# EAGLE board FlexMedusaSubmitted (EAGLE 6.4)
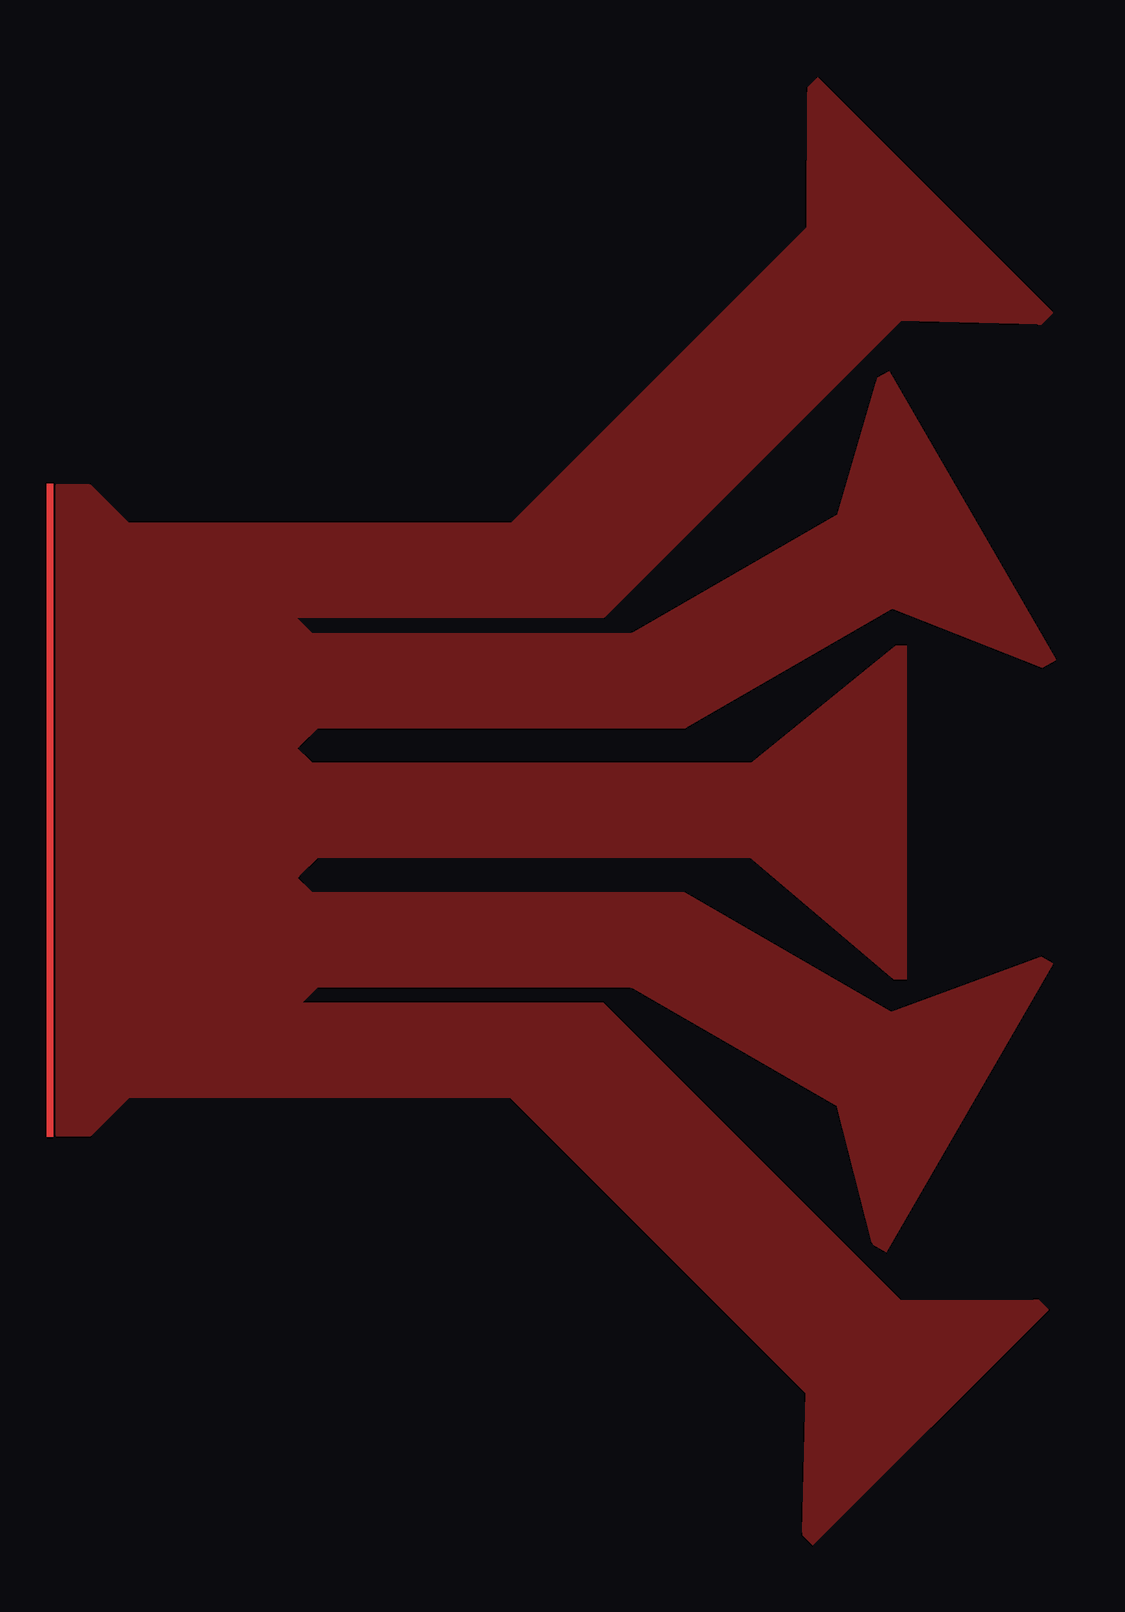
[diagram p0: board, top side]
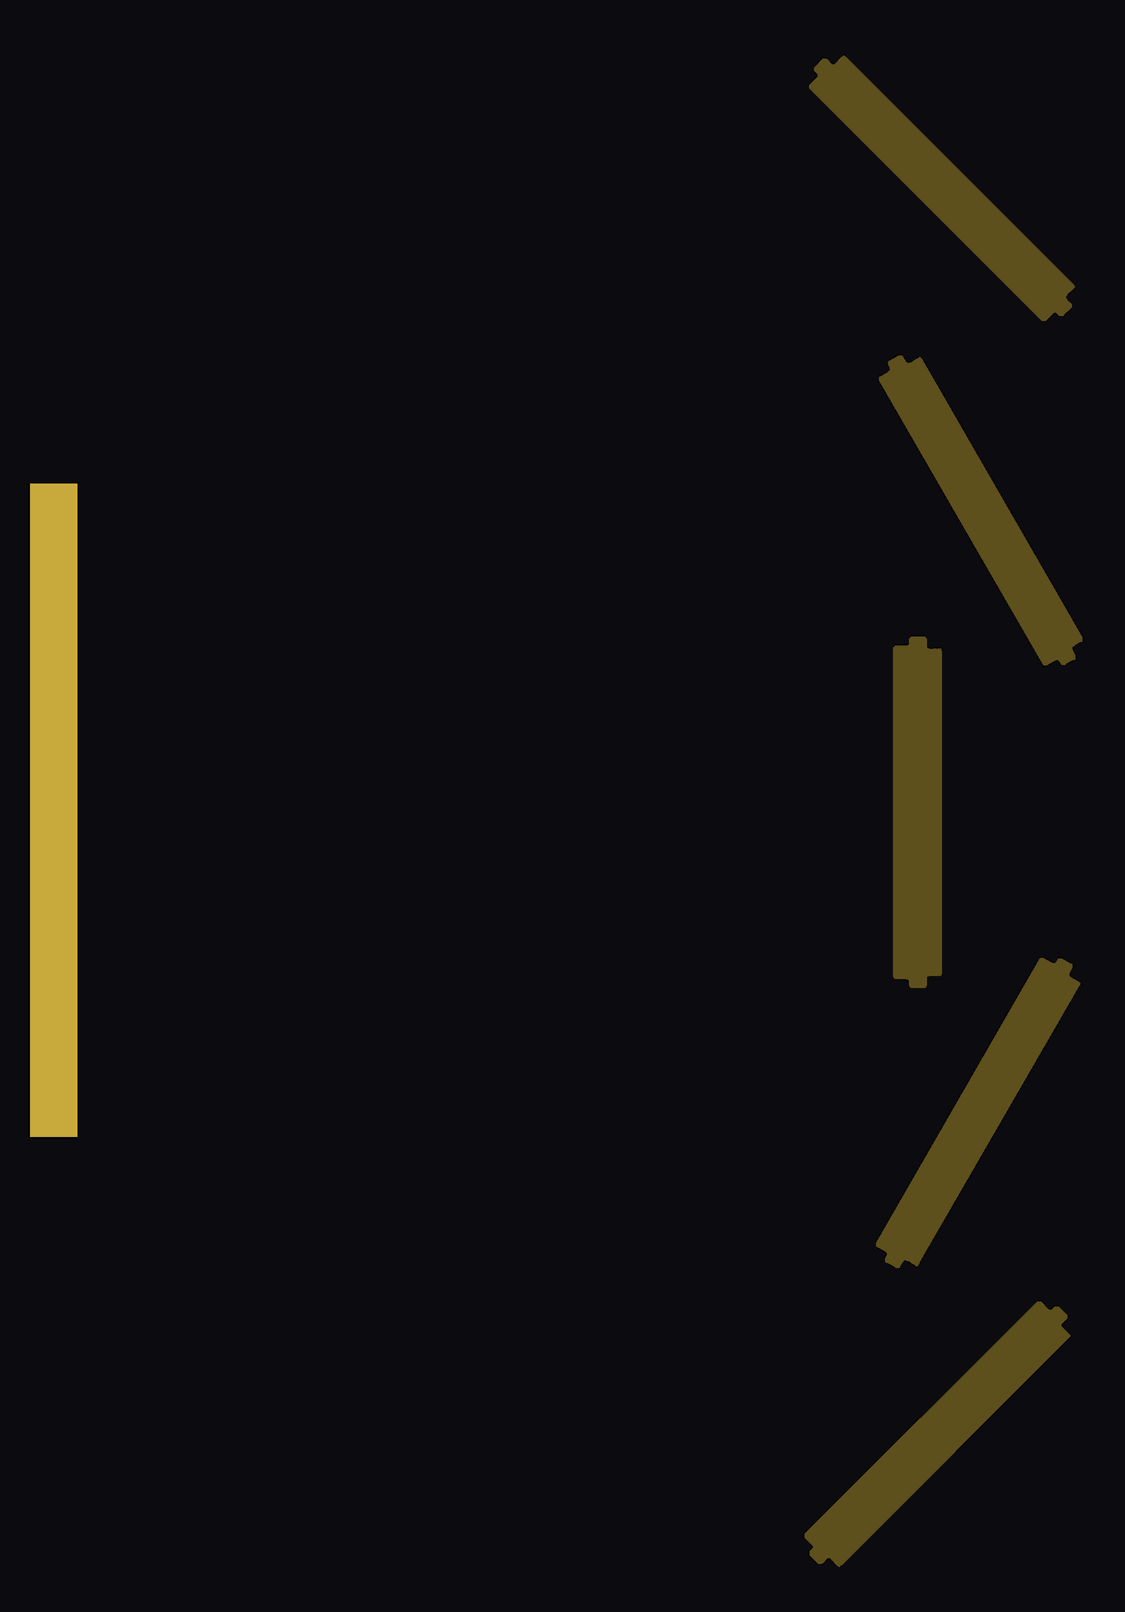
[diagram p1: board, inner layer Stiffner]
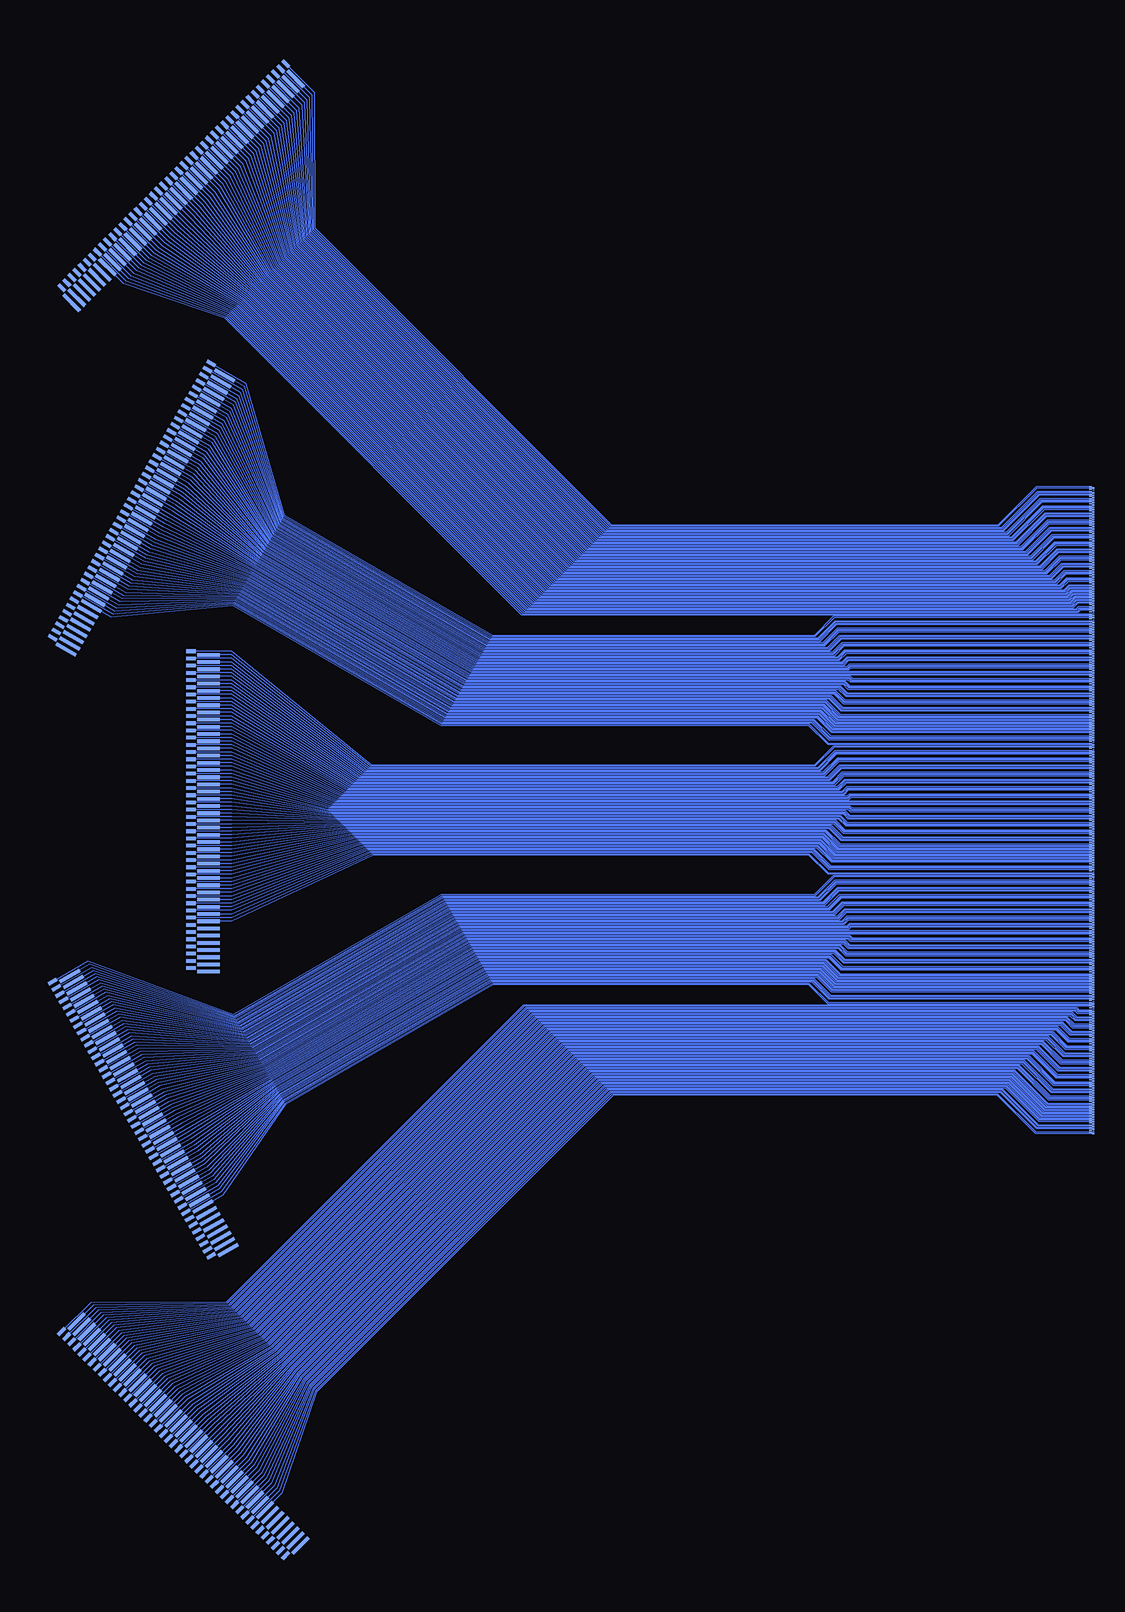
[diagram p2: board, bottom side, seen from below]

No outline drawn. Coordinates in mm, seen from the top.
Copper layers (1*2*3*4*16): TopCoverlay 0.035mm / dielectric 1.5mm / Stiffner 0.035mm / dielectric 0.15mm / tin 0.035mm / dielectric 0.2mm / Route4 0.035mm / dielectric 0.15mm / Copper 0.035mm
Design rules "default *": minimum track width 10mil, minimum drill 24mil, track to track 8mil, track to pad 8mil, pad to pad 8mil, via to via 8mil, smd to smd 8mil, copper to edge 40mil, drill to drill 8mil, minimum pad ring 10mil, minimum via ring 8mil, stop-mask expansion 4mil, vias tented up to drill 0mil, thermal gap 10mil

## Footprints (pad centres in the part's own frame; a part is rotated, then mirrored left to right if it is on the bottom)
WIREBOND-NEW = smd 0.18 x 0.12 bottom: P$1 0,0; P$5 0,0.4; P$7 0,0.6; P$9 0,0.8; P$11 0,1; P$13 0,1.2; P$15 0,1.4; P$17 0,1.6; P$19 0,1.8; P$21 0,2; P$23 0,2.2; P$25 0,2.4; P$27 0,2.6; P$29 0,2.8; P$31 0,3; P$33 0,3.2; P$35 0,3.4; P$37 0,3.6; P$39 0,3.8; P$41 0,4; P$43 0,4.2; P$45 0,4.4; P$47 0,4.6; P$49 0,4.8; P$51 0,5; P$53 0,5.2; P$55 0,5.4; P$57 0,5.6; P$59 0,5.8; P$61 0,6; P$63 0,6.2; P$65 0,6.4; P$67 0,6.6; P$69 0,6.8; P$71 0,7; P$73 0,7.2; P$75 0,7.4; P$77 0,7.6; P$79 0,7.8; P$81 0,8; P$83 0,8.2; P$85 0,8.4; P$87 0,8.6; P$89 0,8.8; P$91 0,9; P$93 0,9.2; P$95 0,9.4; P$97 0,9.6; P$99 0,9.8; P$101 0,10; P$103 0,10.2; P$107 0,10.6; P$109 0,10.8; P$113 0,11.2; P$115 0,11.4; P$117 0,11.6; P$119 0,11.8; P$121 0,12; P$123 0,12.2; P$125 0,12.4; P$127 0,12.6; P$129 0,12.8; P$131 0,13; P$133 0,13.2; P$135 0,13.4; P$137 0,13.6; P$139 0,13.8; P$141 0,14; P$143 0,14.2; P$145 0,14.4; P$147 0,14.6; P$149 0,14.8; P$151 0,15; P$153 0,15.2; P$155 0,15.4; P$157 0,15.6; P$159 0,15.8; P$161 0,16; P$163 0,16.2; P$165 0,16.4; P$167 0,16.6; P$169 0,16.8; P$171 0,17; P$173 0,17.2; P$175 0,17.4; P$177 0,17.6; P$179 0,17.8; P$181 0,18; P$183 0,18.2; P$185 0,18.4; P$187 0,18.6; P$189 0,18.8; P$191 0,19; P$193 0,19.2; P$195 0,19.4; P$197 0,19.6; P$199 0,19.8; P$201 0,20; P$203 0,20.2; P$205 0,20.4; P$207 0,20.6; P$209 0,20.8; P$211 0,21; P$215 0,21.4; P$217 0,21.6; P$221 0,22; P$223 0,22.2; P$225 0,22.4; P$227 0,22.6; P$229 0,22.8; P$231 0,23; P$233 0,23.2; P$235 0,23.4; P$237 0,23.6; P$239 0,23.8; P$241 0,24; P$243 0,24.2; P$245 0,24.4; P$247 0,24.6; P$249 0,24.8; P$251 0,25; P$253 0,25.2; P$255 0,25.4; P$257 0,25.6; P$259 0,25.8; P$261 0,26; P$263 0,26.2; P$265 0,26.4; P$267 0,26.6; P$269 0,26.8; P$271 0,27; P$273 0,27.2; P$275 0,27.4; P$277 0,27.6; P$279 0,27.8; P$281 0,28; P$283 0,28.2; P$285 0,28.4; P$287 0,28.6; P$289 0,28.8; P$291 0,29; P$293 0,29.2; P$295 0,29.4; P$297 0,29.6; P$299 0,29.8; P$301 0,30; P$303 0,30.2; P$305 0,30.4; P$307 0,30.6; P$309 0,30.8; P$311 0,31; P$313 0,31.2; P$315 0,31.4; P$317 0,31.6; P$319 0,31.8; P$323 0,32.2; P$325 0,32.4; P$329 0,32.8; P$331 0,33; P$333 0,33.2; P$335 0,33.4; P$337 0,33.6; P$339 0,33.8; P$341 0,34; P$343 0,34.2; P$345 0,34.4; P$347 0,34.6; P$349 0,34.8; P$351 0,35; P$353 0,35.2; P$355 0,35.4; P$357 0,35.6; P$359 0,35.8; P$361 0,36; P$363 0,36.2; P$365 0,36.4; P$367 0,36.6; P$369 0,36.8; P$371 0,37; P$373 0,37.2; P$375 0,37.4; P$377 0,37.6; P$379 0,37.8; P$381 0,38; P$383 0,38.2; P$385 0,38.4; P$387 0,38.6; P$389 0,38.8; P$391 0,39; P$393 0,39.2; P$395 0,39.4; P$397 0,39.6; P$399 0,39.8; P$401 0,40; P$403 0,40.2; P$405 0,40.4; P$407 0,40.6; P$409 0,40.8; P$411 0,41; P$413 0,41.2; P$415 0,41.4; P$417 0,41.6; P$419 0,41.8; P$421 0,42; P$423 0,42.2; P$425 0,42.4; P$427 0,42.6; P$431 0,43; P$433 0,43.2; P$437 0,43.6; P$439 0,43.8; P$441 0,44; P$443 0,44.2; P$445 0,44.4; P$447 0,44.6; P$449 0,44.8; P$451 0,45; P$453 0,45.2; P$455 0,45.4; P$457 0,45.6; P$459 0,45.8; P$461 0,46; P$463 0,46.2; P$465 0,46.4; P$467 0,46.6; P$469 0,46.8; P$471 0,47; P$473 0,47.2; P$475 0,47.4; P$477 0,47.6; P$479 0,47.8; P$481 0,48; P$483 0,48.2; P$485 0,48.4; P$487 0,48.6; P$489 0,48.8; P$491 0,49; P$493 0,49.2; P$495 0,49.4; P$497 0,49.6; P$499 0,49.8; P$501 0,50; P$503 0,50.2; P$505 0,50.4; P$507 0,50.6; P$509 0,50.8; P$511 0,51; P$513 0,51.2; P$515 0,51.4; P$517 0,51.6; P$519 0,51.8; P$521 0,52; P$523 0,52.2; P$525 0,52.4; P$527 0,52.6; P$529 0,52.8; P$531 0,53; P$533 0,53.2; P$535 0,53.4; P$539 0,53.8 | smd 0.18 x 0.08 bottom: P$2 0.22,0.1; P$4 0.22,0.3; P$6 0.22,0.5; P$8 0.22,0.7; P$10 0.22,0.9; P$12 0.22,1.1; P$14 0.22,1.3; P$16 0.22,1.5; P$18 0.22,1.7; P$20 0.22,1.9; P$22 0.22,2.1; P$24 0.22,2.3; P$26 0.22,2.5; P$28 0.22,2.7; P$30 0.22,2.9; P$32 0.22,3.1; P$34 0.22,3.3; P$36 0.22,3.5; P$38 0.22,3.7; P$40 0.22,3.9; P$42 0.22,4.1; P$44 0.22,4.3; P$46 0.22,4.5; P$48 0.22,4.7; P$50 0.22,4.9; P$52 0.22,5.1; P$54 0.22,5.3; P$56 0.22,5.5; P$58 0.22,5.7; P$60 0.22,5.9; P$62 0.22,6.1; P$64 0.22,6.3; P$66 0.22,6.5; P$68 0.22,6.7; P$70 0.22,6.9; P$72 0.22,7.1; P$74 0.22,7.3; P$76 0.22,7.5; P$78 0.22,7.7; P$80 0.22,7.9; P$82 0.22,8.1; P$84 0.22,8.3; P$86 0.22,8.5; P$88 0.22,8.7; P$90 0.22,8.9; P$92 0.22,9.1; P$94 0.22,9.3; P$96 0.22,9.5; P$98 0.22,9.7; P$100 0.22,9.9; P$102 0.22,10.1; P$104 0.22,10.3; P$106 0.22,10.5; P$108 0.22,10.7; P$110 0.22,10.9; P$112 0.22,11.1; P$114 0.22,11.3; P$116 0.22,11.5; P$118 0.22,11.7; P$120 0.22,11.9; P$122 0.22,12.1; P$124 0.22,12.3; P$126 0.22,12.5; P$128 0.22,12.7; P$130 0.22,12.9; P$132 0.22,13.1; P$134 0.22,13.3; P$136 0.22,13.5; P$138 0.22,13.7; P$140 0.22,13.9; P$142 0.22,14.1; P$144 0.22,14.3; P$146 0.22,14.5; P$148 0.22,14.7; P$150 0.22,14.9; P$152 0.22,15.1; P$154 0.22,15.3; P$156 0.22,15.5; P$158 0.22,15.7; P$160 0.22,15.9; P$162 0.22,16.1; P$164 0.22,16.3; P$166 0.22,16.5; P$168 0.22,16.7; P$170 0.22,16.9; P$172 0.22,17.1; P$174 0.22,17.3; P$176 0.22,17.5; P$178 0.22,17.7; P$180 0.22,17.9; P$182 0.22,18.1; P$184 0.22,18.3; P$186 0.22,18.5; P$188 0.22,18.7; P$190 0.22,18.9; P$192 0.22,19.1; P$194 0.22,19.3; P$196 0.22,19.5; P$198 0.22,19.7; P$200 0.22,19.9; P$202 0.22,20.1; P$204 0.22,20.3; P$206 0.22,20.5; P$208 0.22,20.7; P$210 0.22,20.9; P$212 0.22,21.1; P$214 0.22,21.3; P$216 0.22,21.5; P$218 0.22,21.7; P$220 0.22,21.9; P$222 0.22,22.1; P$224 0.22,22.3; P$226 0.22,22.5; P$228 0.22,22.7; P$230 0.22,22.9; P$232 0.22,23.1; P$234 0.22,23.3; P$236 0.22,23.5; P$238 0.22,23.7; P$240 0.22,23.9; P$242 0.22,24.1; P$244 0.22,24.3; P$246 0.22,24.5; P$248 0.22,24.7; P$250 0.22,24.9; P$252 0.22,25.1; P$254 0.22,25.3; P$256 0.22,25.5; P$258 0.22,25.7; P$260 0.22,25.9; P$262 0.22,26.1; P$264 0.22,26.3; P$266 0.22,26.5; P$268 0.22,26.7; P$270 0.22,26.9; P$272 0.22,27.1; P$274 0.22,27.3; P$276 0.22,27.5; P$278 0.22,27.7; P$280 0.22,27.9; P$282 0.22,28.1; P$284 0.22,28.3; P$286 0.22,28.5; P$288 0.22,28.7; P$290 0.22,28.9; P$292 0.22,29.1; P$294 0.22,29.3; P$296 0.22,29.5; P$298 0.22,29.7; P$300 0.22,29.9; P$302 0.22,30.1; P$304 0.22,30.3; P$306 0.22,30.5; P$308 0.22,30.7; P$310 0.22,30.9; P$312 0.22,31.1; P$314 0.22,31.3; P$316 0.22,31.5; P$318 0.22,31.7; P$320 0.22,31.9; P$322 0.22,32.1; P$324 0.22,32.3; P$326 0.22,32.5; P$328 0.22,32.7; P$330 0.22,32.9; P$332 0.22,33.1; P$334 0.22,33.3; P$336 0.22,33.5; P$338 0.22,33.7; P$340 0.22,33.9; P$342 0.22,34.1; P$344 0.22,34.3; P$346 0.22,34.5; P$348 0.22,34.7; P$350 0.22,34.9; P$352 0.22,35.1; P$354 0.22,35.3; P$356 0.22,35.5; P$358 0.22,35.7; P$360 0.22,35.9; P$362 0.22,36.1; P$364 0.22,36.3; P$366 0.22,36.5; P$368 0.22,36.7; P$370 0.22,36.9; P$372 0.22,37.1; P$374 0.22,37.3; P$376 0.22,37.5; P$378 0.22,37.7; P$380 0.22,37.9; P$382 0.22,38.1; P$384 0.22,38.3; P$386 0.22,38.5; P$388 0.22,38.7; P$390 0.22,38.9; P$392 0.22,39.1; P$394 0.22,39.3; P$396 0.22,39.5; P$398 0.22,39.7; P$400 0.22,39.9; P$402 0.22,40.1; P$404 0.22,40.3; P$406 0.22,40.5; P$408 0.22,40.7; P$410 0.22,40.9; P$412 0.22,41.1; P$414 0.22,41.3; P$416 0.22,41.5; P$418 0.22,41.7; P$420 0.22,41.9; P$422 0.22,42.1; P$424 0.22,42.3; P$426 0.22,42.5; P$428 0.22,42.7; P$430 0.22,42.9; P$432 0.22,43.1; P$434 0.22,43.3; P$436 0.22,43.5; P$438 0.22,43.7; P$440 0.22,43.9; P$442 0.22,44.1; P$444 0.22,44.3; P$446 0.22,44.5; P$448 0.22,44.7; P$450 0.22,44.9; P$452 0.22,45.1; P$454 0.22,45.3; P$456 0.22,45.5; P$458 0.22,45.7; P$460 0.22,45.9; P$462 0.22,46.1; P$464 0.22,46.3; P$466 0.22,46.5; P$468 0.22,46.7; P$470 0.22,46.9; P$472 0.22,47.1; P$474 0.22,47.3; P$476 0.22,47.5; P$478 0.22,47.7; P$480 0.22,47.9; P$482 0.22,48.1; P$484 0.22,48.3; P$486 0.22,48.5; P$488 0.22,48.7; P$490 0.22,48.9; P$492 0.22,49.1; P$494 0.22,49.3; P$496 0.22,49.5; P$498 0.22,49.7; P$500 0.22,49.9; P$502 0.22,50.1; P$504 0.22,50.3; P$506 0.22,50.5; P$508 0.22,50.7; P$510 0.22,50.9; P$512 0.22,51.1; P$514 0.22,51.3; P$516 0.22,51.5; P$518 0.22,51.7; P$520 0.22,51.9; P$522 0.22,52.1; P$524 0.22,52.3; P$526 0.22,52.5; P$528 0.22,52.7; P$530 0.22,52.9; P$532 0.22,53.1; P$534 0.22,53.3; P$536 0.22,53.5; P$538 0.22,53.7; P$540 0.22,53.9
ZIF-NEW = smd 0.8 x 0.3: P$1 0,0; P$3 0,0.6; P$5 0,1.2; P$7 0,1.8; P$9 0,2.4; P$11 0,3; P$13 0,3.6; P$15 0,4.2; P$17 0,4.8; P$19 0,5.4; P$21 0,6; P$23 0,6.6; P$25 0,7.2; P$27 0,7.8; P$29 0,8.4; P$31 0,9; P$33 0,9.6; P$35 0,10.2; P$37 0,10.8; P$39 0,11.4; P$41 0,12; P$43 0,12.6; P$45 0,13.2; P$47 0,13.8; P$49 0,14.4; P$51 0,15; P$53 0,15.6; P$55 0,16.2; P$57 0,16.8; P$59 0,17.4; P$61 0,18; P$63 0,18.6; P$65 0,19.2; P$67 0,19.8; P$69 0,20.4; P$71 0,21; P$73 0,21.6; P$75 0,22.2; P$77 0,22.8; P$79 0,23.4; P$81 0,24; P$83 0,24.6; P$85 0,25.2; P$87 0,25.8; P$89 0,26.4 | smd 1.9 x 0.3: P$2 -1.47,0.3; P$4 -1.47,0.9; P$6 -1.47,1.5; P$8 -1.47,2.1; P$10 -1.47,2.7; P$12 -1.47,3.3; P$14 -1.47,3.9; P$16 -1.47,4.5; P$18 -1.47,5.1; P$20 -1.47,5.7; P$22 -1.47,6.3; P$24 -1.47,6.9; P$26 -1.47,7.5; P$28 -1.47,8.1; P$30 -1.47,8.7; P$32 -1.47,9.3; P$34 -1.47,9.9; P$36 -1.47,10.5; P$38 -1.47,11.1; P$40 -1.47,11.7; P$42 -1.47,12.3; P$44 -1.47,12.9; P$46 -1.47,13.5; P$48 -1.47,14.1; P$50 -1.47,14.7; P$52 -1.47,15.3; P$54 -1.47,15.9; P$56 -1.47,16.5; P$58 -1.47,17.1; P$60 -1.47,17.7; P$62 -1.47,18.3; P$64 -1.47,18.9; P$66 -1.47,19.5; P$68 -1.47,20.1; P$70 -1.47,20.7; P$72 -1.47,21.3; P$74 -1.47,21.9; P$76 -1.47,22.5; P$78 -1.47,23.1; P$80 -1.47,23.7; P$82 -1.47,24.3; P$84 -1.47,24.9; P$86 -1.47,25.5; P$88 -1.47,26.1; P$90 -1.47,26.7

## Placement (x,y rotation side)
WB  [WIREBOND-NEW]  0,0 0 top
Z1  [ZIF-NEW]  67.29,89.16 135 bottom
Z2  [ZIF-NEW]  73.51,64.19 150 bottom
Z3  [ZIF-NEW]  75.19,40.2 180 bottom
Z4  [ZIF-NEW]  86.71,12.67 210 bottom
Z5  [ZIF-NEW]  85.97,-16.49 225 bottom

## Library data of the parts
WB = WIREBOND-NEW
Z1-Z5 = ZIF-NEW

## Tracks (layer width: path | path; a pad name or v marks a point on that pad's centre or on a via)
RTE1
  Copper 0.05: 0,0 4.8,0 8,3.2 40,3.2 64.75,-21.55 67.63,-29.98 69.04,-31.4
RTE2
  Copper 0.05: 0.22,0.1 4.75,0.1 7.95,3.3 40.1,3.3 64.85,-21.45 67.84,-29.77 70.25,-32.17
RTE5
  Copper 0.05: 0,0.4 4.7,0.4 7.7,3.4 40.2,3.4 64.95,-21.35 68.05,-29.56 69.47,-30.97
RTE6
  Copper 0.05: 0.22,0.5 4.65,0.5 7.65,3.5 40.3,3.5 65.05,-21.25 68.27,-29.34 70.67,-31.75
RTE7
  Copper 0.05: 0,0.6 4.6,0.6 7.6,3.6 40.4,3.6 65.15,-21.15 68.48,-29.13 69.89,-30.55
RTE8
  Copper 0.05: 0.22,0.7 4.55,0.7 7.55,3.7 40.5,3.7 65.25,-21.05 68.69,-28.92 71.09,-31.32
RTE11
  Copper 0.05: 0,1 4.5,1 7.3,3.8 40.6,3.8 65.35,-20.95 68.9,-28.71 70.32,-30.12
RTE12
  Copper 0.05: 0.22,1.1 4.45,1.1 7.25,3.9 40.7,3.9 65.45,-20.85 69.11,-28.5 71.52,-30.9
RTE13
  Copper 0.05: 0,1.2 4.4,1.2 7.2,4 40.8,4 65.55,-20.75 69.33,-28.29 70.74,-29.7
RTE14
  Copper 0.05: 0.22,1.3 4.35,1.3 7.15,4.1 40.9,4.1 65.65,-20.65 69.54,-28.07 71.94,-30.48
RTE15
  Copper 0.05: 0,1.4 4.3,1.4 7.1,4.2 41,4.2 65.75,-20.55 69.75,-27.86 71.17,-29.27
RTE16
  Copper 0.05: 0.22,1.5 4.25,1.5 7.05,4.3 41.1,4.3 65.85,-20.45 69.96,-27.65 72.37,-30.05
RTE17
  Copper 0.05: 0,1.6 4.2,1.6 7,4.4 41.2,4.4 65.95,-20.35 70.17,-27.44 71.59,-28.85
RTE18
  Copper 0.05: 0.22,1.7 4.15,1.7 6.95,4.5 41.3,4.5 66.05,-20.25 70.39,-27.22 72.79,-29.63
RTE19
  Copper 0.05: 0,1.8 4.1,1.8 6.9,4.6 41.4,4.6 66.15,-20.15 70.6,-27.01 72.01,-28.43
RTE20
  Copper 0.05: 0.22,1.9 4.05,1.9 6.85,4.7 41.5,4.7 66.25,-20.05 70.81,-26.8 73.22,-29.2
RTE21
  Copper 0.05: 0,2 4,2 6.8,4.8 41.6,4.8 66.35,-19.95 71.02,-26.59 72.44,-28
RTE22
  Copper 0.05: 0.22,2.1 3.95,2.1 6.75,4.9 41.7,4.9 66.45,-19.85 71.24,-26.38 73.64,-28.78
RTE23
  Copper 0.05: 0,2.2 3.9,2.2 6.7,5 41.8,5 66.55,-19.75 71.45,-26.16 72.86,-27.58
RTE24
  Copper 0.05: 0.22,2.3 3.85,2.3 6.65,5.1 41.9,5.1 66.65,-19.65 71.66,-25.95 74.06,-28.36
RTE25
  Copper 0.05: 0,2.4 3.8,2.4 6.6,5.2 42,5.2 66.75,-19.55 71.87,-25.74 73.29,-27.15
RTE26
  Copper 0.05: 0.22,2.5 3.75,2.5 6.55,5.3 42.1,5.3 66.85,-19.45 72.08,-25.53 74.49,-27.93
RTE29
  Copper 0.05: 0,2.8 3.7,2.8 6.3,5.4 42.2,5.4 66.95,-19.35 72.3,-25.32 73.71,-26.73
RTE30
  Copper 0.05: 0.22,2.9 3.65,2.9 6.25,5.5 42.3,5.5 67.05,-19.25 72.51,-25.1 74.91,-27.51
RTE31
  Copper 0.05: 0,3 3.6,3 6.2,5.6 42.4,5.6 67.15,-19.15 72.72,-24.89 74.14,-26.3
RTE32
  Copper 0.05: 0.22,3.1 3.55,3.1 6.15,5.7 42.5,5.7 67.25,-19.05 72.93,-24.68 75.34,-27.08
RTE35
  Copper 0.05: 0,3.4 3.5,3.4 5.9,5.8 42.6,5.8 67.35,-18.95 73.14,-24.47 74.56,-25.88
RTE36
  Copper 0.05: 0.22,3.5 3.45,3.5 5.85,5.9 42.7,5.9 67.45,-18.85 73.36,-24.25 75.76,-26.66
RTE37
  Copper 0.05: 0,3.6 3.4,3.6 5.8,6 42.8,6 67.55,-18.75 73.57,-24.04 74.98,-25.46
RTE38
  Copper 0.05: 0.22,3.7 3.35,3.7 5.75,6.1 42.9,6.1 67.65,-18.65 73.78,-23.83 76.19,-26.23
RTE41
  Copper 0.05: 0,4 3.3,4 5.5,6.2 43,6.2 67.75,-18.55 73.99,-23.62 75.41,-25.03
RTE42
  Copper 0.05: 0.22,4.1 3.25,4.1 5.45,6.3 43.1,6.3 67.85,-18.45 74.21,-23.41 76.61,-25.81
RTE43
  Copper 0.05: 0,4.2 3.2,4.2 5.4,6.4 43.2,6.4 67.95,-18.35 74.42,-23.19 75.83,-24.61
RTE44
  Copper 0.05: 0.22,4.3 3.15,4.3 5.35,6.5 43.3,6.5 68.05,-18.25 74.63,-22.98 77.03,-25.39
RTE47
  Copper 0.05: 0,4.6 3.1,4.6 5.1,6.6 43.4,6.6 68.15,-18.15 74.84,-22.77 76.26,-24.18
RTE48
  Copper 0.05: 0.22,4.7 3.05,4.7 5.05,6.7 43.5,6.7 68.25,-18.05 75.05,-22.56 77.46,-24.96
RTE49
  Copper 0.05: 0,4.8 3,4.8 5,6.8 43.6,6.8 68.35,-17.95 75.27,-22.34 76.68,-23.76
RTE50
  Copper 0.05: 0.22,4.9 2.95,4.9 4.95,6.9 43.7,6.9 68.45,-17.85 75.48,-22.13 77.88,-24.54
RTE53
  Copper 0.05: 0,5.2 2.9,5.2 4.7,7 43.8,7 68.55,-17.75 75.69,-21.92 77.11,-23.34
RTE54
  Copper 0.05: 0.22,5.3 2.85,5.3 4.65,7.1 43.9,7.1 68.65,-17.65 75.9,-21.71 78.31,-24.11
RTE55
  Copper 0.05: 0,5.4 2.8,5.4 4.6,7.2 44,7.2 68.75,-17.55 76.11,-21.5 77.53,-22.91
RTE56
  Copper 0.05: 0.22,5.5 2.75,5.5 4.55,7.3 44.1,7.3 68.85,-17.45 76.33,-21.28 78.73,-23.69
RTE59
  Copper 0.05: 0,5.8 2.7,5.8 4.3,7.4 44.2,7.4 68.95,-17.35 76.54,-21.07 77.95,-22.49
RTE60
  Copper 0.05: 0.22,5.9 2.65,5.9 4.25,7.5 44.3,7.5 69.05,-17.25 76.75,-20.86 79.16,-23.26
RTE61
  Copper 0.05: 0,6 2.6,6 4.2,7.6 44.4,7.6 69.15,-17.15 76.96,-20.65 78.38,-22.06
RTE62
  Copper 0.05: 0.22,6.1 2.55,6.1 4.15,7.7 44.5,7.7 69.25,-17.05 77.17,-20.44 79.58,-22.84
RTE65
  Copper 0.05: 0,6.4 2.5,6.4 3.9,7.8 44.6,7.8 69.35,-16.95 77.39,-20.22 78.8,-21.64
RTE66
  Copper 0.05: 0.22,6.5 2.45,6.5 3.85,7.9 44.7,7.9 69.45,-16.85 77.6,-20.01 80,-22.42
RTE67
  Copper 0.05: 0,6.6 2.4,6.6 3.8,8 44.8,8 69.55,-16.75 77.81,-19.8 79.23,-21.21
RTE68
  Copper 0.05: 0.22,6.7 2.35,6.7 3.75,8.1 44.9,8.1 69.65,-16.65 78.02,-19.59 80.43,-21.99
RTE71
  Copper 0.05: 0,7 2.3,7 3.5,8.2 45,8.2 69.75,-16.55 78.24,-19.38 79.65,-20.79
RTE72
  Copper 0.05: 0.22,7.1 2.25,7.1 3.45,8.3 45.1,8.3 69.85,-16.45 78.45,-19.16 80.85,-21.57
RTE73
  Copper 0.05: 0,7.2 2.2,7.2 3.4,8.4 45.2,8.4 69.95,-16.35 78.66,-18.95 80.08,-20.36
RTE74
  Copper 0.05: 0.22,7.3 2.15,7.3 3.35,8.5 45.3,8.5 70.05,-16.25 78.87,-18.74 81.28,-21.14
RTE77
  Copper 0.05: 0,7.6 2.1,7.6 3.1,8.6 45.4,8.6 70.15,-16.15 79.08,-18.53 80.5,-19.94
RTE78
  Copper 0.05: 0.22,7.7 2.05,7.7 3.05,8.7 45.5,8.7 70.25,-16.05 79.3,-18.31 81.7,-20.72
RTE79
  Copper 0.05: 0,7.8 2,7.8 3,8.8 45.6,8.8 70.35,-15.95 79.51,-18.1 80.92,-19.52
RTE80
  Copper 0.05: 0.22,7.9 1.95,7.9 2.95,8.9 45.7,8.9 70.45,-15.85 79.72,-17.89 82.12,-20.29
RTE83
  Copper 0.05: 0,8.2 1.9,8.2 2.7,9 45.8,9 70.55,-15.75 79.93,-17.68 81.35,-19.09
RTE84
  Copper 0.05: 0.22,8.3 1.85,8.3 2.65,9.1 45.9,9.1 70.65,-15.65 80.14,-17.47 82.55,-19.87
RTE85
  Copper 0.05: 0,8.4 1.8,8.4 2.6,9.2 46,9.2 70.75,-15.55 80.36,-17.25 81.77,-18.67
RTE86
  Copper 0.05: 0.22,8.5 1.75,8.5 2.55,9.3 46.1,9.3 70.85,-15.45 80.57,-17.04 82.97,-19.45
RTE89
  Copper 0.05: 0,8.8 1.7,8.8 2.3,9.4 46.2,9.4 70.95,-15.35 80.78,-16.83 82.2,-18.24
RTE90
  Copper 0.05: 0.22,8.9 1.65,8.9 2.25,9.5 46.3,9.5 71.05,-15.25 80.99,-16.62 83.4,-19.02
RTE91
  Copper 0.05: 0,9 1.6,9 2.2,9.6 46.4,9.6 71.15,-15.15 81.21,-16.41 82.62,-17.82
RTE92
  Copper 0.05: 0.22,9.1 1.55,9.1 2.15,9.7 46.5,9.7 71.25,-15.05 81.42,-16.19 83.82,-18.6
RTE95
  Copper 0.05: 0,9.4 1.5,9.4 1.9,9.8 46.6,9.8 71.35,-14.95 81.63,-15.98 83.04,-17.39
RTE96
  Copper 0.05: 0.22,9.5 1.45,9.5 1.85,9.9 46.7,9.9 71.45,-14.85 81.84,-15.77 84.25,-18.17
RTE97
  Copper 0.05: 0,9.6 1.4,9.6 1.8,10 46.8,10 71.55,-14.75 82.05,-15.56 83.47,-16.97
RTE98
  Copper 0.05: 0.22,9.7 1.35,9.7 1.75,10.1 46.9,10.1 71.65,-14.65 82.27,-15.35 84.67,-17.75
RTE101
  Copper 0.05: 0,10 1.3,10 1.5,10.2 47,10.2 71.75,-14.55 82.48,-15.13 83.89,-16.55
RTE102
  Copper 0.05: 0.22,10.1 1.25,10.1 1.45,10.3 47.1,10.3 71.85,-14.45 82.69,-14.92 85.09,-17.32
RTE103
  Copper 0.05: 0,10.2 1.2,10.2 1.4,10.4 47.2,10.4 71.95,-14.35 82.9,-14.71 84.32,-16.12
RTE104
  Copper 0.05: 0.22,10.3 1.15,10.3 1.35,10.5 47.3,10.5 72.05,-14.25 83.11,-14.5 85.52,-16.9
RTE107
  Copper 0.05: 0,10.6 47.4,10.6 72.15,-14.15 83.33,-14.28 84.74,-15.7
RTE108
  Copper 0.05: 0.22,10.7 47.5,10.7 72.25,-14.05 83.54,-14.07 85.94,-16.48
RTE109
  Copper 0.05: 0,10.8 22.1,10.8 23.7,12.4 50,12.4 67.32,2.4 72.53,-5.12 74.26,-6.12
RTE110
  Copper 0.05: 0.22,10.9 22.05,10.9 23.65,12.5 50.06,12.5 67.38,2.5 72.67,-4.86 75.62,-6.56
RTE113
  Copper 0.05: 0,11.2 22,11.2 23.4,12.6 50.12,12.6 67.44,2.6 72.83,-4.6 74.56,-5.6
RTE114
  Copper 0.05: 0.22,11.3 21.95,11.3 23.35,12.7 50.17,12.7 67.49,2.7 72.97,-4.34 75.92,-6.04
RTE115
  Copper 0.05: 0,11.4 21.9,11.4 23.3,12.8 50.23,12.8 67.55,2.8 73.12,-4.08 74.86,-5.08
RTE116
  Copper 0.05: 0.22,11.5 21.85,11.5 23.25,12.9 50.29,12.9 67.61,2.9 73.28,-3.82 76.22,-5.52
RTE119
  Copper 0.05: 0,11.8 21.8,11.8 23,13 50.35,13 67.67,3 73.42,-3.56 75.16,-4.56
RTE120
  Copper 0.05: 0.22,11.9 21.75,11.9 22.95,13.1 50.4,13.1 67.72,3.1 73.58,-3.3 76.52,-5
RTE121
  Copper 0.05: 0,12 21.7,12 22.9,13.2 50.46,13.2 67.78,3.2 73.72,-3.04 75.46,-4.04
RTE122
  Copper 0.05: 0.22,12.1 21.65,12.1 22.85,13.3 50.52,13.3 67.84,3.3 73.88,-2.78 76.82,-4.48
RTE123
  Copper 0.05: 0,12.2 21.6,12.2 22.8,13.4 50.58,13.4 67.9,3.4 74.03,-2.52 75.76,-3.52
RTE124
  Copper 0.05: 0.22,12.3 21.55,12.3 22.75,13.5 50.63,13.5 67.96,3.5 74.17,-2.26 77.12,-3.96
RTE125
  Copper 0.05: 0,12.4 21.5,12.4 22.7,13.6 50.69,13.6 68.01,3.6 74.33,-2 76.06,-3
RTE126
  Copper 0.05: 0.22,12.5 21.45,12.5 22.65,13.7 50.75,13.7 68.07,3.7 74.47,-1.74 77.42,-3.44
RTE127
  Copper 0.05: 0,12.6 21.4,12.6 22.6,13.8 50.81,13.8 68.13,3.8 74.62,-1.49 76.36,-2.48
RTE128
  Copper 0.05: 0.22,12.7 21.35,12.7 22.55,13.9 50.87,13.9 68.19,3.9 74.78,-1.23 77.72,-2.92
RTE129
  Copper 0.05: 0,12.8 21.3,12.8 22.5,14 50.92,14 68.24,4 74.92,-0.96 76.66,-1.97
RTE130
  Copper 0.05: 0.22,12.9 21.25,12.9 22.45,14.1 50.98,14.1 68.3,4.1 75.08,-0.7 78.02,-2.4
RTE131
  Copper 0.05: 0,13 21.2,13 22.4,14.2 51.04,14.2 68.36,4.2 75.22,-0.45 76.96,-1.45
RTE132
  Copper 0.05: 0.22,13.1 21.15,13.1 22.35,14.3 51.1,14.3 68.42,4.3 75.38,-0.19 78.32,-1.89
RTE133
  Copper 0.05: 0,13.2 21.1,13.2 22.3,14.4 51.16,14.4 68.47,4.4 75.53,0.07 77.26,-0.93
RTE134
  Copper 0.05: 0.22,13.3 21.05,13.3 22.25,14.5 51.21,14.5 68.53,4.5 75.67,0.33 78.62,-1.37
RTE137
  Copper 0.05: 0,13.6 21,13.6 22,14.6 51.27,14.6 68.59,4.6 75.83,0.59 77.56,-0.41
RTE138
  Copper 0.05: 0.22,13.7 20.95,13.7 21.95,14.7 51.33,14.7 68.65,4.7 75.97,0.85 78.92,-0.85
RTE139
  Copper 0.05: 0,13.8 20.9,13.8 21.9,14.8 51.39,14.8 68.71,4.8 76.12,1.11 77.86,0.11
RTE140
  Copper 0.05: 0.22,13.9 20.85,13.9 21.85,14.9 51.44,14.9 68.76,4.9 76.28,1.37 79.22,-0.33
RTE143
  Copper 0.05: 0,14.2 20.8,14.2 21.6,15 51.5,15 68.82,5 76.42,1.63 78.16,0.63
RTE144
  Copper 0.05: 0.22,14.3 20.75,14.3 21.55,15.1 51.56,15.1 68.88,5.1 76.58,1.89 79.52,0.19
RTE145
  Copper 0.05: 0,14.4 20.7,14.4 21.5,15.2 51.62,15.2 68.94,5.2 76.72,2.15 78.46,1.15
RTE146
  Copper 0.05: 0.22,14.5 20.65,14.5 21.45,15.3 51.67,15.3 69,5.3 76.88,2.41 79.82,0.71
RTE149
  Copper 0.05: 0,14.8 20.6,14.8 21.2,15.4 51.73,15.4 69.05,5.4 77.03,2.67 78.76,1.67
RTE150
  Copper 0.05: 0.22,14.9 20.55,14.9 21.15,15.5 51.79,15.5 69.11,5.5 77.17,2.93 80.12,1.23
RTE151
  Copper 0.05: 0,15 20.5,15 21.1,15.6 51.85,15.6 69.17,5.6 77.33,3.19 79.06,2.19
RTE152
  Copper 0.05: 0.22,15.1 20.45,15.1 21.05,15.7 51.91,15.7 69.23,5.7 77.47,3.45 80.42,1.75
RTE155
  Copper 0.05: 0,15.4 20.4,15.4 20.8,15.8 51.96,15.8 69.28,5.8 77.62,3.71 79.36,2.71
RTE156
  Copper 0.05: 0.22,15.5 20.35,15.5 20.75,15.9 52.02,15.9 69.34,5.9 77.78,3.97 80.72,2.27
RTE157
  Copper 0.05: 0,15.6 20.3,15.6 20.7,16 52.08,16 69.4,6 77.92,4.23 79.66,3.23
RTE158
  Copper 0.05: 0.22,15.7 20.25,15.7 20.65,16.1 52.14,16.1 69.46,6.1 78.08,4.49 81.02,2.79
RTE161
  Copper 0.05: 0,16 20.2,16 20.4,16.2 52.19,16.2 69.51,6.2 78.22,4.75 79.96,3.75
RTE162
  Copper 0.05: 0.22,16.1 20.15,16.1 20.35,16.3 52.25,16.3 69.57,6.3 78.38,5.01 81.32,3.31
RTE163
  Copper 0.05: 0,16.2 20.1,16.2 20.3,16.4 52.31,16.4 69.63,6.4 78.53,5.27 80.26,4.27
RTE164
  Copper 0.05: 0.22,16.3 20.05,16.3 20.25,16.5 52.37,16.5 69.69,6.5 78.67,5.53 81.62,3.83
RTE167
  Copper 0.05: 0,16.6 52.42,16.6 69.75,6.6 78.83,5.79 80.56,4.79
RTE168
  Copper 0.05: 0.22,16.7 52.48,16.7 69.8,6.7 78.97,6.05 81.92,4.35
RTE169
  Copper 0.05: 0,16.8 52.54,16.8 69.86,6.8 79.12,6.31 80.86,5.31
RTE170
  Copper 0.05: 0.22,16.9 52.6,16.9 69.92,6.9 79.28,6.57 82.22,4.87
RTE173
  Copper 0.05: 0,17.2 20.2,17.2 20.4,17 52.66,17 69.98,7 79.42,6.83 81.16,5.83
RTE174
  Copper 0.05: 0.22,17.3 20.25,17.3 20.45,17.1 52.71,17.1 70.03,7.1 79.58,7.09 82.52,5.39
RTE175
  Copper 0.05: 0,17.4 20.3,17.4 20.5,17.2 52.77,17.2 70.09,7.2 79.72,7.35 81.46,6.35
RTE176
  Copper 0.05: 0.22,17.5 20.35,17.5 20.55,17.3 52.83,17.3 70.15,7.3 79.88,7.61 82.82,5.91
RTE179
  Copper 0.05: 0,17.8 20.4,17.8 20.8,17.4 52.89,17.4 70.21,7.4 80.03,7.87 81.76,6.87
RTE180
  Copper 0.05: 0.22,17.9 20.45,17.9 20.85,17.5 52.94,17.5 70.27,7.5 80.17,8.13 83.12,6.43
RTE181
  Copper 0.05: 0,18 20.5,18 20.9,17.6 53,17.6 70.32,7.6 80.33,8.39 82.06,7.39
RTE182
  Copper 0.05: 0.22,18.1 20.55,18.1 20.95,17.7 53.06,17.7 70.38,7.7 80.47,8.65 83.42,6.95
RTE185
  Copper 0.05: 0,18.4 20.6,18.4 21.2,17.8 53.12,17.8 70.44,7.8 80.62,8.91 82.36,7.91
RTE186
  Copper 0.05: 0.22,18.5 20.65,18.5 21.25,17.9 53.17,17.9 70.5,7.9 80.78,9.17 83.72,7.47
RTE187
  Copper 0.05: 0,18.6 20.7,18.6 21.3,18 53.23,18 70.55,8 80.92,9.43 82.66,8.43
RTE188
  Copper 0.05: 0.22,18.7 20.75,18.7 21.35,18.1 53.29,18.1 70.61,8.1 81.08,9.69 84.02,7.99
RTE191
  Copper 0.05: 0,19 20.8,19 21.6,18.2 53.35,18.2 70.67,8.2 81.22,9.95 82.96,8.95
RTE192
  Copper 0.05: 0.22,19.1 20.85,19.1 21.65,18.3 53.41,18.3 70.73,8.3 81.38,10.21 84.32,8.51
RTE193
  Copper 0.05: 0,19.2 20.9,19.2 21.7,18.4 53.46,18.4 70.78,8.4 81.53,10.47 83.26,9.47
RTE194
  Copper 0.05: 0.22,19.3 20.95,19.3 21.75,18.5 53.52,18.5 70.84,8.5 81.67,10.73 84.62,9.03
RTE197
  Copper 0.05: 0,19.6 21,19.6 22,18.6 53.58,18.6 70.9,8.6 81.83,10.99 83.56,9.99
RTE198
  Copper 0.05: 0.22,19.7 21.05,19.7 22.05,18.7 53.64,18.7 70.96,8.7 81.97,11.25 84.92,9.55
RTE199
  Copper 0.05: 0,19.8 21.1,19.8 22.1,18.8 53.7,18.8 71.02,8.8 82.12,11.51 83.86,10.51
RTE200
  Copper 0.05: 0.22,19.9 21.15,19.9 22.15,18.9 53.75,18.9 71.07,8.9 82.28,11.77 85.22,10.07
RTE203
  Copper 0.05: 0,20.2 21.2,20.2 22.4,19 53.81,19 71.13,9 82.42,12.03 84.16,11.03
RTE204
  Copper 0.05: 0.22,20.3 21.25,20.3 22.45,19.1 53.87,19.1 71.19,9.1 82.58,12.29 85.52,10.59
RTE205
  Copper 0.05: 0,20.4 21.3,20.4 22.5,19.2 53.93,19.2 71.25,9.2 82.72,12.54 84.46,11.54
RTE206
  Copper 0.05: 0.22,20.5 21.35,20.5 22.55,19.3 53.98,19.3 71.3,9.3 82.88,12.8 85.82,11.11
RTE209
  Copper 0.05: 0,20.8 21.4,20.8 22.8,19.4 54.04,19.4 71.36,9.4 83.03,13.06 84.76,12.06
RTE210
  Copper 0.05: 0.22,20.9 21.45,20.9 22.85,19.5 54.1,19.5 71.42,9.5 83.17,13.32 86.12,11.62
RTE211
  Copper 0.05: 0,21 21.5,21 22.9,19.6 54.16,19.6 71.48,9.6 83.33,13.58 85.06,12.58
RTE212
  Copper 0.05: 0.22,21.1 21.55,21.1 22.95,19.7 54.22,19.7 71.53,9.7 83.47,13.84 86.42,12.14
RTE215
  Copper 0.05: 0,21.4 21.6,21.4 23.2,19.8 54.27,19.8 71.59,9.8 83.62,14.1 85.36,13.1
RTE216
  Copper 0.05: 0.22,21.5 21.65,21.5 23.25,19.9 54.33,19.9 71.65,9.9 83.78,14.36 86.72,12.66
RTE217
  Copper 0.05: 0,21.6 22.1,21.6 23.7,23.2 60,23.2 71.8,17.7 73.8,17.7
RTE218
  Copper 0.05: 0.22,21.7 22.05,21.7 23.65,23.3 60.1,23.3 71.8,18 75.2,18
RTE221
  Copper 0.05: 0,22 22,22 23.4,23.4 60.2,23.4 71.8,18.3 73.8,18.3
RTE222
  Copper 0.05: 0.22,22.1 21.95,22.1 23.35,23.5 60.3,23.5 71.8,18.6 75.2,18.6
RTE223
  Copper 0.05: 0,22.2 21.9,22.2 23.3,23.6 60.4,23.6 71.8,18.9 73.8,18.9
RTE224
  Copper 0.05: 0.22,22.3 21.85,22.3 23.25,23.7 60.5,23.7 71.8,19.2 75.2,19.2
RTE227
  Copper 0.05: 0,22.6 21.8,22.6 23,23.8 60.6,23.8 71.8,19.5 73.8,19.5
RTE228
  Copper 0.05: 0.22,22.7 21.75,22.7 22.95,23.9 60.7,23.9 71.8,19.8 75.2,19.8
RTE229
  Copper 0.05: 0,22.8 21.7,22.8 22.9,24 60.8,24 71.8,20.1 73.8,20.1
RTE230
  Copper 0.05: 0.22,22.9 21.65,22.9 22.85,24.1 60.9,24.1 71.8,20.4 75.2,20.4
RTE231
  Copper 0.05: 0,23 21.6,23 22.8,24.2 61,24.2 71.8,20.7 73.8,20.7
RTE232
  Copper 0.05: 0.22,23.1 21.55,23.1 22.75,24.3 61.1,24.3 71.8,21 75.2,21
RTE233
  Copper 0.05: 0,23.2 21.5,23.2 22.7,24.4 61.2,24.4 71.8,21.3 73.8,21.3
RTE234
  Copper 0.05: 0.22,23.3 21.45,23.3 22.65,24.5 61.3,24.5 71.8,21.6 75.2,21.6
RTE235
  Copper 0.05: 0,23.4 21.4,23.4 22.6,24.6 61.4,24.6 71.8,21.9 73.8,21.9
RTE236
  Copper 0.05: 0.22,23.5 21.35,23.5 22.55,24.7 61.5,24.7 71.8,22.2 75.2,22.2
RTE237
  Copper 0.05: 0,23.6 21.3,23.6 22.5,24.8 61.6,24.8 71.8,22.5 73.8,22.5
RTE238
  Copper 0.05: 0.22,23.7 21.25,23.7 22.45,24.9 61.7,24.9 71.8,22.8 75.2,22.8
RTE239
  Copper 0.05: 0,23.8 21.2,23.8 22.4,25 61.8,25 71.8,23.1 73.8,23.1
RTE240
  Copper 0.05: 0.22,23.9 21.15,23.9 22.35,25.1 61.9,25.1 71.8,23.4 75.2,23.4
RTE241
  Copper 0.05: 0,24 21.1,24 22.3,25.2 62,25.2 71.8,23.7 73.8,23.7
RTE242
  Copper 0.05: 0.22,24.1 21.05,24.1 22.25,25.3 62.1,25.3 71.8,24 75.2,24
RTE245
  Copper 0.05: 0,24.4 21,24.4 22,25.4 62.2,25.4 71.8,24.3 73.8,24.3
RTE246
  Copper 0.05: 0.22,24.5 20.95,24.5 21.95,25.5 62.3,25.5 71.8,24.6 75.2,24.6
RTE247
  Copper 0.05: 0,24.6 20.9,24.6 21.9,25.6 62.4,25.6 71.8,24.9 73.8,24.9
RTE248
  Copper 0.05: 0.22,24.7 20.85,24.7 21.85,25.7 62.5,25.7 71.8,25.2 75.2,25.2
RTE251
  Copper 0.05: 0,25 20.8,25 21.6,25.8 62.6,25.8 71.8,25.5 73.8,25.5
RTE252
  Copper 0.05: 0.22,25.1 20.75,25.1 21.55,25.9 62.7,25.9 71.8,25.8 75.2,25.8
RTE253
  Copper 0.05: 0,25.2 20.7,25.2 21.5,26 62.8,26 71.8,26.1 73.8,26.1
RTE254
  Copper 0.05: 0.22,25.3 20.65,25.3 21.45,26.1 62.9,26.1 71.8,26.4 75.2,26.4
RTE257
  Copper 0.05: 0,25.6 20.6,25.6 21.2,26.2 63,26.2 71.8,26.7 73.8,26.7
RTE258
  Copper 0.05: 0.22,25.7 20.55,25.7 21.15,26.3 63.1,26.3 71.8,27 75.2,27
RTE259
  Copper 0.05: 0,25.8 20.5,25.8 21.1,26.4 63.2,26.4 71.8,27.3 73.8,27.3
RTE260
  Copper 0.05: 0.22,25.9 20.45,25.9 21.05,26.5 63.3,26.5 71.8,27.6 75.2,27.6
RTE263
  Copper 0.05: 0,26.2 20.4,26.2 20.8,26.6 63.4,26.6 71.8,27.9 73.8,27.9
RTE264
  Copper 0.05: 0.22,26.3 20.35,26.3 20.75,26.7 63.5,26.7 71.8,28.2 75.2,28.2
RTE265
  Copper 0.05: 0,26.4 20.3,26.4 20.7,26.8 63.6,26.8 71.8,28.5 73.8,28.5
RTE266
  Copper 0.05: 0.22,26.5 20.25,26.5 20.65,26.9 63.7,26.9 71.8,28.8 75.2,28.8
RTE269
  Copper 0.05: 0,26.8 20.2,26.8 20.4,27 63.8,27 71.8,29.1 73.8,29.1
RTE270
  Copper 0.05: 0.22,26.9 20.15,26.9 20.35,27.1 63.7,27.1 71.8,29.4 75.2,29.4
RTE271
  Copper 0.05: 0,27 20.1,27 20.3,27.2 63.6,27.2 71.8,29.7 73.8,29.7
RTE272
  Copper 0.05: 0.22,27.1 20.05,27.1 20.25,27.3 63.5,27.3 71.8,30 75.2,30
RTE275
  Copper 0.05: 0,27.4 63.4,27.4 71.8,30.3 73.8,30.3
RTE276
  Copper 0.05: 0.22,27.5 63.3,27.5 71.8,30.6 75.2,30.6
RTE277
  Copper 0.05: 0,27.6 63.2,27.6 71.8,30.9 73.8,30.9
RTE278
  Copper 0.05: 0.22,27.7 63.1,27.7 71.8,31.2 75.2,31.2
RTE281
  Copper 0.05: 0,28 20.2,28 20.4,27.8 63,27.8 71.8,31.5 73.8,31.5
RTE282
  Copper 0.05: 0.22,28.1 20.25,28.1 20.45,27.9 62.9,27.9 71.8,31.8 75.2,31.8
RTE283
  Copper 0.05: 0,28.2 20.3,28.2 20.5,28 62.8,28 71.8,32.1 73.8,32.1
RTE284
  Copper 0.05: 0.22,28.3 20.35,28.3 20.55,28.1 62.7,28.1 71.8,32.4 75.2,32.4
RTE287
  Copper 0.05: 0,28.6 20.4,28.6 20.8,28.2 62.6,28.2 71.8,32.7 73.8,32.7
RTE288
  Copper 0.05: 0.22,28.7 20.45,28.7 20.85,28.3 62.5,28.3 71.8,33 75.2,33
RTE289
  Copper 0.05: 0,28.8 20.5,28.8 20.9,28.4 62.4,28.4 71.8,33.3 73.8,33.3
RTE290
  Copper 0.05: 0.22,28.9 20.55,28.9 20.95,28.5 62.3,28.5 71.8,33.6 75.2,33.6
RTE293
  Copper 0.05: 0,29.2 20.6,29.2 21.2,28.6 62.2,28.6 71.8,33.9 73.8,33.9
RTE294
  Copper 0.05: 0.22,29.3 20.65,29.3 21.25,28.7 62.1,28.7 71.8,34.2 75.2,34.2
RTE295
  Copper 0.05: 0,29.4 20.7,29.4 21.3,28.8 62,28.8 71.8,34.5 73.8,34.5
RTE296
  Copper 0.05: 0.22,29.5 20.75,29.5 21.35,28.9 61.9,28.9 71.8,34.8 75.2,34.8
RTE299
  Copper 0.05: 0,29.8 20.8,29.8 21.6,29 61.8,29 71.8,35.1 73.8,35.1
RTE300
  Copper 0.05: 0.22,29.9 20.85,29.9 21.65,29.1 61.7,29.1 71.8,35.4 75.2,35.4
RTE301
  Copper 0.05: 0,30 20.9,30 21.7,29.2 61.6,29.2 71.8,35.7 73.8,35.7
RTE302
  Copper 0.05: 0.22,30.1 20.95,30.1 21.75,29.3 61.5,29.3 71.8,36 75.2,36
RTE305
  Copper 0.05: 0,30.4 21,30.4 22,29.4 61.4,29.4 71.8,36.3 73.8,36.3
RTE306
  Copper 0.05: 0.22,30.5 21.05,30.5 22.05,29.5 61.3,29.5 71.8,36.6 75.2,36.6
RTE307
  Copper 0.05: 0,30.6 21.1,30.6 22.1,29.6 61.2,29.6 71.8,36.9 73.8,36.9
RTE308
  Copper 0.05: 0.22,30.7 21.15,30.7 22.15,29.7 61.1,29.7 71.8,37.2 75.2,37.2
RTE311
  Copper 0.05: 0,31 21.2,31 22.4,29.8 61,29.8 71.8,37.5 73.8,37.5
RTE312
  Copper 0.05: 0.22,31.1 21.25,31.1 22.45,29.9 60.9,29.9 71.8,37.8 75.2,37.8
RTE313
  Copper 0.05: 0,31.2 21.3,31.2 22.5,30 60.8,30 71.8,38.1 73.8,38.1
RTE314
  Copper 0.05: 0.22,31.3 21.35,31.3 22.55,30.1 60.7,30.1 71.8,38.4 75.2,38.4
RTE317
  Copper 0.05: 0,31.6 21.4,31.6 22.8,30.2 60.6,30.2 71.8,38.7 73.8,38.7
RTE318
  Copper 0.05: 0.22,31.7 21.45,31.7 22.85,30.3 60.5,30.3 71.8,39 75.2,39
RTE319
  Copper 0.05: 0,31.8 21.5,31.8 22.9,30.4 60.4,30.4 71.8,39.3 73.8,39.3
RTE320
  Copper 0.05: 0.22,31.9 21.55,31.9 22.95,30.5 60.3,30.5 71.8,39.6 75.2,39.6
RTE323
  Copper 0.05: 0,32.2 21.6,32.2 23.2,30.6 60.2,30.6 71.8,39.9 73.8,39.9
RTE324
  Copper 0.05: 0.22,32.3 21.65,32.3 23.25,30.7 60.1,30.7 71.8,40.2 75.2,40.2
RTE325
  Copper 0.05: 0,32.4 22.1,32.4 23.7,34 54.39,34 71.71,44 81.83,43.01 83.56,44.01
RTE326
  Copper 0.05: 0.22,32.5 22.05,32.5 23.65,34.1 54.33,34.1 71.65,44.1 81.67,43.27 84.62,44.97
RTE329
  Copper 0.05: 0,32.8 22,32.8 23.4,34.2 54.27,34.2 71.59,44.2 81.53,43.53 83.26,44.53
RTE330
  Copper 0.05: 0.22,32.9 21.95,32.9 23.35,34.3 54.22,34.3 71.53,44.3 81.38,43.79 84.32,45.49
RTE331
  Copper 0.05: 0,33 21.9,33 23.3,34.4 54.16,34.4 71.48,44.4 81.22,44.05 82.96,45.05
RTE332
  Copper 0.05: 0.22,33.1 21.85,33.1 23.25,34.5 54.1,34.5 71.42,44.5 81.08,44.31 84.02,46.01
RTE335
  Copper 0.05: 0,33.4 21.8,33.4 23,34.6 54.04,34.6 71.36,44.6 80.92,44.57 82.66,45.57
RTE336
  Copper 0.05: 0.22,33.5 21.75,33.5 22.95,34.7 53.98,34.7 71.3,44.7 80.78,44.83 83.72,46.53
RTE337
  Copper 0.05: 0,33.6 21.7,33.6 22.9,34.8 53.93,34.8 71.25,44.8 80.62,45.09 82.36,46.09
RTE338
  Copper 0.05: 0.22,33.7 21.65,33.7 22.85,34.9 53.87,34.9 71.19,44.9 80.47,45.35 83.42,47.05
RTE339
  Copper 0.05: 0,33.8 21.6,33.8 22.8,35 53.81,35 71.13,45 80.33,45.61 82.06,46.61
RTE340
  Copper 0.05: 0.22,33.9 21.55,33.9 22.75,35.1 53.75,35.1 71.07,45.1 80.17,45.87 83.12,47.57
RTE341
  Copper 0.05: 0,34 21.5,34 22.7,35.2 53.7,35.2 71.02,45.2 80.03,46.13 81.76,47.13
RTE342
  Copper 0.05: 0.22,34.1 21.45,34.1 22.65,35.3 53.64,35.3 70.96,45.3 79.88,46.39 82.82,48.09
RTE343
  Copper 0.05: 0,34.2 21.4,34.2 22.6,35.4 53.58,35.4 70.9,45.4 79.72,46.65 81.46,47.65
RTE344
  Copper 0.05: 0.22,34.3 21.35,34.3 22.55,35.5 53.52,35.5 70.84,45.5 79.58,46.91 82.52,48.61
RTE345
  Copper 0.05: 0,34.4 21.3,34.4 22.5,35.6 53.46,35.6 70.78,45.6 79.42,47.17 81.16,48.17
RTE346
  Copper 0.05: 0.22,34.5 21.25,34.5 22.45,35.7 53.41,35.7 70.73,45.7 79.28,47.43 82.22,49.13
RTE347
  Copper 0.05: 0,34.6 21.2,34.6 22.4,35.8 53.35,35.8 70.67,45.8 79.12,47.69 80.86,48.69
RTE348
  Copper 0.05: 0.22,34.7 21.15,34.7 22.35,35.9 53.29,35.9 70.61,45.9 78.97,47.95 81.92,49.65
RTE349
  Copper 0.05: 0,34.8 21.1,34.8 22.3,36 53.23,36 70.55,46 78.83,48.21 80.56,49.21
RTE350
  Copper 0.05: 0.22,34.9 21.05,34.9 22.25,36.1 53.17,36.1 70.5,46.1 78.67,48.47 81.62,50.17
RTE353
  Copper 0.05: 0,35.2 21,35.2 22,36.2 53.12,36.2 70.44,46.2 78.53,48.73 80.26,49.73
RTE354
  Copper 0.05: 0.22,35.3 20.95,35.3 21.95,36.3 53.06,36.3 70.38,46.3 78.38,48.99 81.32,50.69
RTE355
  Copper 0.05: 0,35.4 20.9,35.4 21.9,36.4 53,36.4 70.32,46.4 78.22,49.25 79.96,50.25
RTE356
  Copper 0.05: 0.22,35.5 20.85,35.5 21.85,36.5 52.94,36.5 70.27,46.5 78.08,49.51 81.02,51.21
RTE359
  Copper 0.05: 0,35.8 20.8,35.8 21.6,36.6 52.89,36.6 70.21,46.6 77.92,49.77 79.66,50.77
RTE360
  Copper 0.05: 0.22,35.9 20.75,35.9 21.55,36.7 52.83,36.7 70.15,46.7 77.78,50.03 80.72,51.73
RTE361
  Copper 0.05: 0,36 20.7,36 21.5,36.8 52.77,36.8 70.09,46.8 77.62,50.29 79.36,51.29
RTE362
  Copper 0.05: 0.22,36.1 20.65,36.1 21.45,36.9 52.71,36.9 70.03,46.9 77.47,50.55 80.42,52.25
RTE365
  Copper 0.05: 0,36.4 20.6,36.4 21.2,37 52.66,37 69.98,47 77.33,50.81 79.06,51.81
RTE366
  Copper 0.05: 0.22,36.5 20.55,36.5 21.15,37.1 52.6,37.1 69.92,47.1 77.17,51.07 80.12,52.77
RTE367
  Copper 0.05: 0,36.6 20.5,36.6 21.1,37.2 52.54,37.2 69.86,47.2 77.03,51.33 78.76,52.33
RTE368
  Copper 0.05: 0.22,36.7 20.45,36.7 21.05,37.3 52.48,37.3 69.8,47.3 76.88,51.59 79.82,53.29
RTE371
  Copper 0.05: 0,37 20.4,37 20.8,37.4 52.42,37.4 69.75,47.4 76.72,51.85 78.46,52.85
RTE372
  Copper 0.05: 0.22,37.1 20.35,37.1 20.75,37.5 52.37,37.5 69.69,47.5 76.58,52.11 79.52,53.81
RTE373
  Copper 0.05: 0,37.2 20.3,37.2 20.7,37.6 52.31,37.6 69.63,47.6 76.42,52.37 78.16,53.37
RTE374
  Copper 0.05: 0.22,37.3 20.25,37.3 20.65,37.7 52.25,37.7 69.57,47.7 76.28,52.63 79.22,54.33
RTE377
  Copper 0.05: 0,37.6 20.2,37.6 20.4,37.8 52.19,37.8 69.51,47.8 76.12,52.89 77.86,53.89
RTE378
  Copper 0.05: 0.22,37.7 20.15,37.7 20.35,37.9 52.14,37.9 69.46,47.9 75.97,53.15 78.92,54.85
RTE379
  Copper 0.05: 0,37.8 20.1,37.8 20.3,38 52.08,38 69.4,48 75.83,53.41 77.56,54.41
RTE380
  Copper 0.05: 0.22,37.9 20.05,37.9 20.25,38.1 52.02,38.1 69.34,48.1 75.67,53.67 78.62,55.37
RTE383
  Copper 0.05: 0,38.2 51.96,38.2 69.28,48.2 75.53,53.93 77.26,54.93
RTE384
  Copper 0.05: 0.22,38.3 51.91,38.3 69.23,48.3 75.38,54.19 78.32,55.89
RTE385
  Copper 0.05: 0,38.4 51.85,38.4 69.17,48.4 75.22,54.45 76.96,55.45
RTE386
  Copper 0.05: 0.22,38.5 51.79,38.5 69.11,48.5 75.08,54.7 78.02,56.41
RTE389
  Copper 0.05: 0,38.8 20.2,38.8 20.4,38.6 51.73,38.6 69.05,48.6 74.92,54.97 76.66,55.97
RTE390
  Copper 0.05: 0.22,38.9 20.25,38.9 20.45,38.7 51.67,38.7 69,48.7 74.78,55.23 77.72,56.92
RTE391
  Copper 0.05: 0,39 20.3,39 20.5,38.8 51.62,38.8 68.94,48.8 74.62,55.48 76.36,56.48
RTE392
  Copper 0.05: 0.22,39.1 20.35,39.1 20.55,38.9 51.56,38.9 68.88,48.9 74.47,55.74 77.42,57.44
RTE395
  Copper 0.05: 0,39.4 20.4,39.4 20.8,39 51.5,39 68.82,49 74.33,56 76.06,57
RTE396
  Copper 0.05: 0.22,39.5 20.45,39.5 20.85,39.1 51.44,39.1 68.76,49.1 74.17,56.26 77.12,57.96
RTE397
  Copper 0.05: 0,39.6 20.5,39.6 20.9,39.2 51.39,39.2 68.71,49.2 74.03,56.52 75.76,57.52
RTE398
  Copper 0.05: 0.22,39.7 20.55,39.7 20.95,39.3 51.33,39.3 68.65,49.3 73.88,56.78 76.82,58.48
RTE401
  Copper 0.05: 0,40 20.6,40 21.2,39.4 51.27,39.4 68.59,49.4 73.72,57.04 75.46,58.04
RTE402
  Copper 0.05: 0.22,40.1 20.65,40.1 21.25,39.5 51.21,39.5 68.53,49.5 73.58,57.3 76.52,59
RTE403
  Copper 0.05: 0,40.2 20.7,40.2 21.3,39.6 51.16,39.6 68.47,49.6 73.42,57.56 75.16,58.56
RTE404
  Copper 0.05: 0.22,40.3 20.75,40.3 21.35,39.7 51.1,39.7 68.42,49.7 73.28,57.82 76.22,59.52
RTE407
  Copper 0.05: 0,40.6 20.8,40.6 21.6,39.8 51.04,39.8 68.36,49.8 73.12,58.08 74.86,59.08
RTE408
  Copper 0.05: 0.22,40.7 20.85,40.7 21.65,39.9 50.98,39.9 68.3,49.9 72.97,58.34 75.92,60.04
RTE409
  Copper 0.05: 0,40.8 20.9,40.8 21.7,40 50.92,40 68.24,50 72.83,58.6 74.56,59.6
RTE410
  Copper 0.05: 0.22,40.9 20.95,40.9 21.75,40.1 50.87,40.1 68.19,50.1 72.67,58.86 75.62,60.56
RTE413
  Copper 0.05: 0,41.2 21,41.2 22,40.2 50.81,40.2 68.13,50.2 72.53,59.12 74.26,60.12
RTE414
  Copper 0.05: 0.22,41.3 21.05,41.3 22.05,40.3 50.75,40.3 68.07,50.3 72.38,59.38 75.32,61.08
RTE415
  Copper 0.05: 0,41.4 21.1,41.4 22.1,40.4 50.69,40.4 68.01,50.4 72.22,59.64 73.96,60.64
RTE416
  Copper 0.05: 0.22,41.5 21.15,41.5 22.15,40.5 50.63,40.5 67.96,50.5 72.08,59.9 75.02,61.6
RTE419
  Copper 0.05: 0,41.8 21.2,41.8 22.4,40.6 50.58,40.6 67.9,50.6 71.92,60.16 73.66,61.16
RTE420
  Copper 0.05: 0.22,41.9 21.25,41.9 22.45,40.7 50.52,40.7 67.84,50.7 71.78,60.42 74.72,62.12
RTE421
  Copper 0.05: 0,42 21.3,42 22.5,40.8 50.46,40.8 67.78,50.8 71.62,60.68 73.36,61.68
RTE422
  Copper 0.05: 0.22,42.1 21.35,42.1 22.55,40.9 50.4,40.9 67.72,50.9 71.47,60.94 74.42,62.64
RTE425
  Copper 0.05: 0,42.4 21.4,42.4 22.8,41 50.35,41 67.67,51 71.33,61.2 73.06,62.2
RTE426
  Copper 0.05: 0.22,42.5 21.45,42.5 22.85,41.1 50.29,41.1 67.61,51.1 71.17,61.46 74.12,63.16
RTE427
  Copper 0.05: 0,42.6 21.5,42.6 22.9,41.2 50.23,41.2 67.55,51.2 71.03,61.72 72.76,62.72
RTE428
  Copper 0.05: 0.22,42.7 21.55,42.7 22.95,41.3 50.17,41.3 67.49,51.3 70.88,61.98 73.82,63.68
RTE431
  Copper 0.05: 0,43 21.6,43 23.2,41.4 50.12,41.4 67.44,51.4 70.72,62.24 72.46,63.24
RTE432
  Copper 0.05: 0.22,43.1 21.65,43.1 23.25,41.5 50.06,41.5 67.38,51.5 70.58,62.5 73.52,64.2
RTE433
  Copper 0.05: 0,43.2 47.6,43.2 72.35,67.95 80.78,70.83 82.2,72.24
RTE434
  Copper 0.05: 0.22,43.3 47.5,43.3 72.25,68.05 80.57,71.04 82.97,73.45
RTE437
  Copper 0.05: 0,43.6 1.1,43.6 1.3,43.4 47.4,43.4 72.15,68.15 80.36,71.25 81.77,72.67
RTE438
  Copper 0.05: 0.22,43.7 1.15,43.7 1.35,43.5 47.3,43.5 72.05,68.25 80.14,71.47 82.55,73.87
RTE439
  Copper 0.05: 0,43.8 1.2,43.8 1.4,43.6 47.2,43.6 71.95,68.35 79.93,71.68 81.35,73.09
RTE440
  Copper 0.05: 0.22,43.9 1.25,43.9 1.45,43.7 47.1,43.7 71.85,68.45 79.72,71.89 82.12,74.29
RTE443
  Copper 0.05: 0,44.2 1.3,44.2 1.7,43.8 47,43.8 71.75,68.55 79.51,72.1 80.92,73.52
RTE444
  Copper 0.05: 0.22,44.3 1.35,44.3 1.75,43.9 46.9,43.9 71.65,68.65 79.3,72.31 81.7,74.72
RTE445
  Copper 0.05: 0,44.4 1.4,44.4 1.8,44 46.8,44 71.55,68.75 79.08,72.53 80.5,73.94
RTE446
  Copper 0.05: 0.22,44.5 1.45,44.5 1.85,44.1 46.7,44.1 71.45,68.85 78.87,72.74 81.28,75.14
RTE447
  Copper 0.05: 0,44.6 1.5,44.6 1.9,44.2 46.6,44.2 71.35,68.95 78.66,72.95 80.08,74.36
RTE448
  Copper 0.05: 0.22,44.7 1.55,44.7 1.95,44.3 46.5,44.3 71.25,69.05 78.45,73.16 80.85,75.57
RTE449
  Copper 0.05: 0,44.8 1.6,44.8 2,44.4 46.4,44.4 71.15,69.15 78.24,73.38 79.65,74.79
RTE450
  Copper 0.05: 0.22,44.9 1.65,44.9 2.05,44.5 46.3,44.5 71.05,69.25 78.02,73.59 80.43,75.99
RTE451
  Copper 0.05: 0,45 1.7,45 2.1,44.6 46.2,44.6 70.95,69.35 77.81,73.8 79.23,75.21
RTE452
  Copper 0.05: 0.22,45.1 1.75,45.1 2.15,44.7 46.1,44.7 70.85,69.45 77.6,74.01 80,76.42
RTE453
  Copper 0.05: 0,45.2 1.8,45.2 2.2,44.8 46,44.8 70.75,69.55 77.39,74.22 78.8,75.64
RTE454
  Copper 0.05: 0.22,45.3 1.85,45.3 2.25,44.9 45.9,44.9 70.65,69.65 77.17,74.44 79.58,76.84
RTE455
  Copper 0.05: 0,45.4 1.9,45.4 2.3,45 45.8,45 70.55,69.75 76.96,74.65 78.38,76.06
RTE456
  Copper 0.05: 0.22,45.5 1.95,45.5 2.35,45.1 45.7,45.1 70.45,69.85 76.75,74.86 79.16,77.26
RTE457
  Copper 0.05: 0,45.6 2,45.6 2.4,45.2 45.6,45.2 70.35,69.95 76.54,75.07 77.95,76.49
RTE458
  Copper 0.05: 0.22,45.7 2.05,45.7 2.45,45.3 45.5,45.3 70.25,70.05 76.33,75.28 78.73,77.69
RTE461
  Copper 0.05: 0,46 2.1,46 2.7,45.4 45.4,45.4 70.15,70.15 76.11,75.5 77.53,76.91
RTE462
  Copper 0.05: 0.22,46.1 2.15,46.1 2.75,45.5 45.3,45.5 70.05,70.25 75.9,75.71 78.31,78.11
RTE463
  Copper 0.05: 0,46.2 2.2,46.2 2.8,45.6 45.2,45.6 69.95,70.35 75.69,75.92 77.11,77.33
RTE464
  Copper 0.05: 0.22,46.3 2.25,46.3 2.85,45.7 45.1,45.7 69.85,70.45 75.48,76.13 77.88,78.54
RTE467
  Copper 0.05: 0,46.6 2.3,46.6 3.1,45.8 45,45.8 69.75,70.55 75.27,76.34 76.68,77.76
RTE468
  Copper 0.05: 0.22,46.7 2.35,46.7 3.15,45.9 44.9,45.9 69.65,70.65 75.05,76.56 77.46,78.96
RTE469
  Copper 0.05: 0,46.8 2.4,46.8 3.2,46 44.8,46 69.55,70.75 74.84,76.77 76.26,78.18
RTE470
  Copper 0.05: 0.22,46.9 2.45,46.9 3.25,46.1 44.7,46.1 69.45,70.85 74.63,76.98 77.03,79.39
RTE473
  Copper 0.05: 0,47.2 2.5,47.2 3.5,46.2 44.6,46.2 69.35,70.95 74.42,77.19 75.83,78.61
RTE474
  Copper 0.05: 0.22,47.3 2.55,47.3 3.55,46.3 44.5,46.3 69.25,71.05 74.21,77.41 76.61,79.81
RTE475
  Copper 0.05: 0,47.4 2.6,47.4 3.6,46.4 44.4,46.4 69.15,71.15 73.99,77.62 75.41,79.03
RTE476
  Copper 0.05: 0.22,47.5 2.65,47.5 3.65,46.5 44.3,46.5 69.05,71.25 73.78,77.83 76.19,80.23
RTE479
  Copper 0.05: 0,47.8 2.7,47.8 3.9,46.6 44.2,46.6 68.95,71.35 73.57,78.04 74.98,79.46
RTE480
  Copper 0.05: 0.22,47.9 2.75,47.9 3.95,46.7 44.1,46.7 68.85,71.45 73.36,78.25 75.76,80.66
RTE481
  Copper 0.05: 0,48 2.8,48 4,46.8 44,46.8 68.75,71.55 73.14,78.47 74.56,79.88
RTE482
  Copper 0.05: 0.22,48.1 2.85,48.1 4.05,46.9 43.9,46.9 68.65,71.65 72.93,78.68 75.34,81.08
RTE485
  Copper 0.05: 0,48.4 2.9,48.4 4.3,47 43.8,47 68.55,71.75 72.72,78.89 74.14,80.31
RTE486
  Copper 0.05: 0.22,48.5 2.95,48.5 4.35,47.1 43.7,47.1 68.45,71.85 72.51,79.1 74.91,81.51
RTE487
  Copper 0.05: 0,48.6 3,48.6 4.4,47.2 43.6,47.2 68.35,71.95 72.3,79.31 73.71,80.73
RTE488
  Copper 0.05: 0.22,48.7 3.05,48.7 4.45,47.3 43.5,47.3 68.25,72.05 72.08,79.53 74.49,81.93
RTE491
  Copper 0.05: 0,49 3.1,49 4.7,47.4 43.4,47.4 68.15,72.15 71.87,79.74 73.29,81.15
RTE492
  Copper 0.05: 0.22,49.1 3.15,49.1 4.75,47.5 43.3,47.5 68.05,72.25 71.66,79.95 74.06,82.36
RTE493
  Copper 0.05: 0,49.2 3.2,49.2 4.8,47.6 43.2,47.6 67.95,72.35 71.45,80.16 72.86,81.58
RTE494
  Copper 0.05: 0.22,49.3 3.25,49.3 4.85,47.7 43.1,47.7 67.85,72.45 71.24,80.38 73.64,82.78
RTE497
  Copper 0.05: 0,49.6 3.3,49.6 5.1,47.8 43,47.8 67.75,72.55 71.02,80.59 72.44,82
RTE498
  Copper 0.05: 0.22,49.7 3.35,49.7 5.15,47.9 42.9,47.9 67.65,72.65 70.81,80.8 73.22,83.2
RTE499
  Copper 0.05: 0,49.8 3.4,49.8 5.2,48 42.8,48 67.55,72.75 70.6,81.01 72.01,82.43
RTE500
  Copper 0.05: 0.22,49.9 3.45,49.9 5.25,48.1 42.7,48.1 67.45,72.85 70.39,81.22 72.79,83.63
RTE503
  Copper 0.05: 0,50.2 3.5,50.2 5.5,48.2 42.6,48.2 67.35,72.95 70.17,81.44 71.59,82.85
RTE504
  Copper 0.05: 0.22,50.3 3.55,50.3 5.55,48.3 42.5,48.3 67.25,73.05 69.96,81.65 72.37,84.05
RTE505
  Copper 0.05: 0,50.4 3.6,50.4 5.6,48.4 42.4,48.4 67.15,73.15 69.75,81.86 71.17,83.28
RTE506
  Copper 0.05: 0.22,50.5 3.65,50.5 5.65,48.5 42.3,48.5 67.05,73.25 69.54,82.07 71.94,84.48
RTE509
  Copper 0.05: 0,50.8 3.7,50.8 5.9,48.6 42.2,48.6 66.95,73.35 69.33,82.28 70.74,83.7
RTE510
  Copper 0.05: 0.22,50.9 3.75,50.9 5.95,48.7 42.1,48.7 66.85,73.45 69.11,82.5 71.52,84.9
RTE511
  Copper 0.05: 0,51 3.8,51 6,48.8 42,48.8 66.75,73.55 68.9,82.71 70.32,84.12
RTE512
  Copper 0.05: 0.22,51.1 3.85,51.1 6.05,48.9 41.9,48.9 66.65,73.65 68.69,82.92 71.09,85.33
RTE515
  Copper 0.05: 0,51.4 3.9,51.4 6.3,49 41.8,49 66.55,73.75 68.48,83.13 69.89,84.55
RTE516
  Copper 0.05: 0.22,51.5 3.95,51.5 6.35,49.1 41.7,49.1 66.45,73.85 68.27,83.34 70.67,85.75
RTE517
  Copper 0.05: 0,51.6 4,51.6 6.4,49.2 41.6,49.2 66.35,73.95 68.05,83.56 69.47,84.97
RTE518
  Copper 0.05: 0.22,51.7 4.05,51.7 6.45,49.3 41.5,49.3 66.25,74.05 67.84,83.77 70.25,86.17
RTE521
  Copper 0.05: 0,52 4.1,52 6.7,49.4 41.4,49.4 66.15,74.15 67.63,83.98 69.04,85.4
RTE522
  Copper 0.05: 0.22,52.1 4.15,52.1 6.75,49.5 41.3,49.5 66.05,74.25 67.42,84.19 69.82,86.6
RTE523
  Copper 0.05: 0,52.2 4.2,52.2 6.8,49.6 41.2,49.6 65.95,74.35 67.2,84.41 68.62,85.82
RTE524
  Copper 0.05: 0.22,52.3 4.25,52.3 6.85,49.7 41.1,49.7 65.85,74.45 66.99,84.62 69.4,87.02
RTE527
  Copper 0.05: 0,52.6 4.3,52.6 7.1,49.8 41,49.8 65.75,74.55 66.78,84.83 68.19,86.24
RTE528
  Copper 0.05: 0.22,52.7 4.35,52.7 7.15,49.9 40.9,49.9 65.65,74.65 66.57,85.04 68.97,87.45
RTE529
  Copper 0.05: 0,52.8 4.4,52.8 7.2,50 40.8,50 65.55,74.75 66.36,85.25 67.77,86.67
RTE530
  Copper 0.05: 0.22,52.9 4.45,52.9 7.25,50.1 40.7,50.1 65.45,74.85 66.14,85.47 68.55,87.87
RTE533
  Copper 0.05: 0,53.2 4.5,53.2 7.5,50.2 40.6,50.2 65.35,74.95 65.93,85.68 67.35,87.09
RTE534
  Copper 0.05: 0.22,53.3 4.55,53.3 7.55,50.3 40.5,50.3 65.25,75.05 65.72,85.89 68.12,88.3
RTE535
  Copper 0.05: 0,53.4 4.6,53.4 7.6,50.4 40.4,50.4 65.15,75.15 65.51,86.1 66.92,87.52
RTE536
  Copper 0.05: 0.22,53.5 4.65,53.5 7.65,50.5 40.3,50.5 65.05,75.25 65.3,86.31 67.7,88.72
RTE539
  Copper 0.05: 0,53.8 4.7,53.8 7.9,50.6 40.2,50.6 64.95,75.35 65.08,86.53 66.5,87.94
RTE540
  Copper 0.05: 0.22,53.9 4.75,53.9 7.95,50.7 40.1,50.7 64.85,75.45 64.87,86.74 67.28,89.14
S$1
  pour TopCoverlay: 65.09,-32.27 64.25,-33.07 64.26,-33.42 65.1,-34.26 84.71,-14.68 83.92,-13.89 83.91,-13.88 83.9,-13.87 83.49,-13.87
S$2
  pour TopCoverlay: 71.25,-6.05 70.05,-8.95 70.11,-9.2 71.2,-9.83 85.07,14.16 84.13,14.7 83.43,14.45
S$3
  pour TopCoverlay: 71.3,14.15 71.63,13.08 71.83,12.92 72.94,12.92 72.94,40.63 72,40.63 71.62,40.31 71.3,14.16
S$4
  pour TopCoverlay: 82.63,40.58 83.88,38.98 84.2,38.86 85.32,39.5 71.47,63.5 70.48,62.93 70.36,62.48
S$5
  pour TopCoverlay: 82.59,68.1 83.86,67.45 84.14,67.45 85.09,68.39 65.5,87.99 64.68,87.17 64.67,86.65
S$6
  pour TopCoverlay: 22.26,21.8 22.43,21.65 22.12,21.34
S$7
  pour TopCoverlay: 22.35,32.72 22.56,32.57 21.98,32
S$9
  pour Stiffner: 72.29,40.2 arc-90 72.02,40.47 72.02,40.48 72.95,40.48 arc90 73.35,40.88 73.35,41.23 74.37,41.23 74.37,40.62 arc90 74.77,40.22 75.62,40.22 arc-90 75.6,40.2 72.74,37.53 72.57,39.44 arc90 72.2,39.74
S$10
  pour Stiffner: 74.89,39.82 arc-90 75.31,40.22 75.62,40.22 75.62,13.33 74.77,13.33 arc90 74.37,12.93 74.37,12.32 73.36,12.32 arc-90 73.35,12.33 73.35,12.67 arc90 72.95,13.07 72.02,13.07 72.02,40.48 72.75,40.32 arc90 73.71,40.34
S$11
  pour Stiffner: 75.49,40.14 75.49,40.23 arc-90 75.58,40.32 75.72,40.32 75.72,40.15 arc-90 75.7,40.13 arc90 75.69,40.14
S$12
  pour Stiffner: 70.93,62.76 70.74,62.91 71.55,63.37 arc90 71.69,63.92 71.52,64.22 72.4,64.73 72.71,64.2 arc90 73.25,64.06 73.99,64.48 arc-90 73.98,64.45 71.93,62.65 71.5,62.66 arc90 71.28,62.65
S$13
  pour Stiffner: 73.61,63.92 arc-90 73.72,64.33 73.99,64.48 87.43,41.19 86.7,40.77 arc90 86.55,40.22 86.86,39.69 85.98,39.19 arc-90 85.97,39.19 85.8,39.49 arc90 85.25,39.63 84.45,39.17 70.74,62.91 71.2,62.94 arc90 71.67,62.86
S$14
  pour Stiffner: 73.92,64.35 73.87,64.43 arc-90 73.9,64.55 74.02,64.62 74.11,64.47 arc-90 74.1,64.44 arc90 74.09,64.45
S$16
  pour Stiffner: 75.22,13.38 arc90 75.37,13.23 75.72,13.23 75.72,13.4 arc90 75.66,13.46 arc-90 75.58,13.38
S$17
  pour Stiffner: 65.34,87.23 arc-90 64.95,87.24 65.61,87.89 arc90 65.61,88.46 65.36,88.71 66.08,89.43 66.52,89 arc90 67.08,89 67.68,89.6 arc-90 67.74,89.17 65.39,86.82
S$18
  pour Stiffner: 67.46,88.96 arc-90 67.46,89.38 67.68,89.6 86.7,70.58 86.1,69.98 arc90 86.1,69.42 86.53,68.99 85.81,68.27 arc-90 85.8,68.27 85.56,68.51 arc90 84.99,68.51 84.33,67.85 64.96,87.23 arc90 66.26,87.67
S$19
  pour Stiffner: 67.65,89.45 67.58,89.51 arc-90 67.58,89.64 67.68,89.74 67.8,89.62 arc-90 67.8,89.59 arc90 67.79,89.59
S$20
  pour Stiffner: 86.01,70.32 arc90 86.58,70.32 86.83,70.58 86.84,70.58 86.72,70.7 arc90 86.61,70.7 arc90 86.39,70.7
S$21
  pour Stiffner: 85,14.03 arc90 85.54,14.18 85.72,14.48 86.6,13.97 86.3,13.44 arc90 86.44,12.9 87.18,12.47 arc-90 84.19,14.5
S$22
  pour Stiffner: 86.5,12.52 arc-90 86.91,12.63 87.18,12.47 73.73,-10.81 73,-10.39 arc90 72.45,-10.54 72.15,-11.06 71.27,-10.56 arc-90 71.27,-10.55 71.44,-10.25 arc90 71.29,-9.7 70.49,-9.24 84.19,14.5 84.49,14.02 arc90 85.02,13.53
S$23
  pour Stiffner: 87.03,12.47 87.07,12.55 arc-90 87.2,12.58 87.32,12.51 87.23,12.36 arc-90 87.2,12.36 arc90 87.2,12.37
S$24
  pour Stiffner: 73.3,-10.22 arc90 73.45,-10.77 73.76,-10.95 73.77,-10.95 73.85,-10.81 arc90 73.82,-10.7 arc90 73.76,-10.48
S$25
  pour Stiffner: 83.94,-14.51 arc-90 83.95,-14.13 84.61,-14.78 arc90 85.17,-14.78 85.42,-14.54 86.14,-15.26 85.71,-15.69 arc90 85.71,-16.25 86.31,-16.86 arc-90 84.52,-16.21
S$26
  pour Stiffner: 85.19,-17.16 arc-90 86.09,-16.64 86.31,-16.86 67.3,-35.87 66.7,-35.27 arc90 66.13,-35.27 65.7,-35.7 64.98,-34.99 arc-90 64.98,-34.97 65.22,-34.73 arc90 65.22,-34.17 64.57,-33.51 83.95,-14.12
S$27
  pour Stiffner: 86.16,-16.82 86.23,-16.76 arc-90 86.35,-16.76 86.45,-16.86 86.33,-16.98 arc-90 86.3,-16.98 arc90 86.3,-16.96
S$28
  pour Stiffner: 67.03,-35.18 arc90 67.03,-35.75 67.3,-36.01 67.41,-35.9 arc90 67.41,-35.78 arc90 67.41,-35.56
WIDTH
  pour TopCoverlay: 1.72,53.9 4.75,53.9 7.95,50.7 40.1,50.7 64.85,75.45 64.87,86.74 83.96,67.65 72.35,67.95 47.6,43.2 4,43.2 21.65,43.1 23.25,41.5 50.06,41.5 67.38,51.5 70.57,62.5 84.07,39.12 71.71,44 54.39,34 23.7,34 22.1,32.4 21.65,32.3 23.25,30.7 60.1,30.7 71.8,40.2 71.8,13.2 60,23.2 23.7,23.2 22.1,21.6 21.65,21.5 23.25,19.9 54.33,19.9 71.65,9.9 83.77,14.36 70.27,-9.02 67.32,2.4 50,12.4 23.7,12.4 22.1,10.8 4.05,10.7 47.5,10.7 72.25,-14.05 83.54,-14.07 64.45,-33.16 64.75,-21.55 40,3.2 8,3.2 4.8,0 1.72,0
(copper drawn outside any net)
  shapes: Stiffner area x1, TopCoverlay area x1, tin area x2